# EAGLE board SparkFun Qwiic ToF Imager - VL53L5CX - Mini-Panel (EAGLE 9.6.2), part 1 of 7
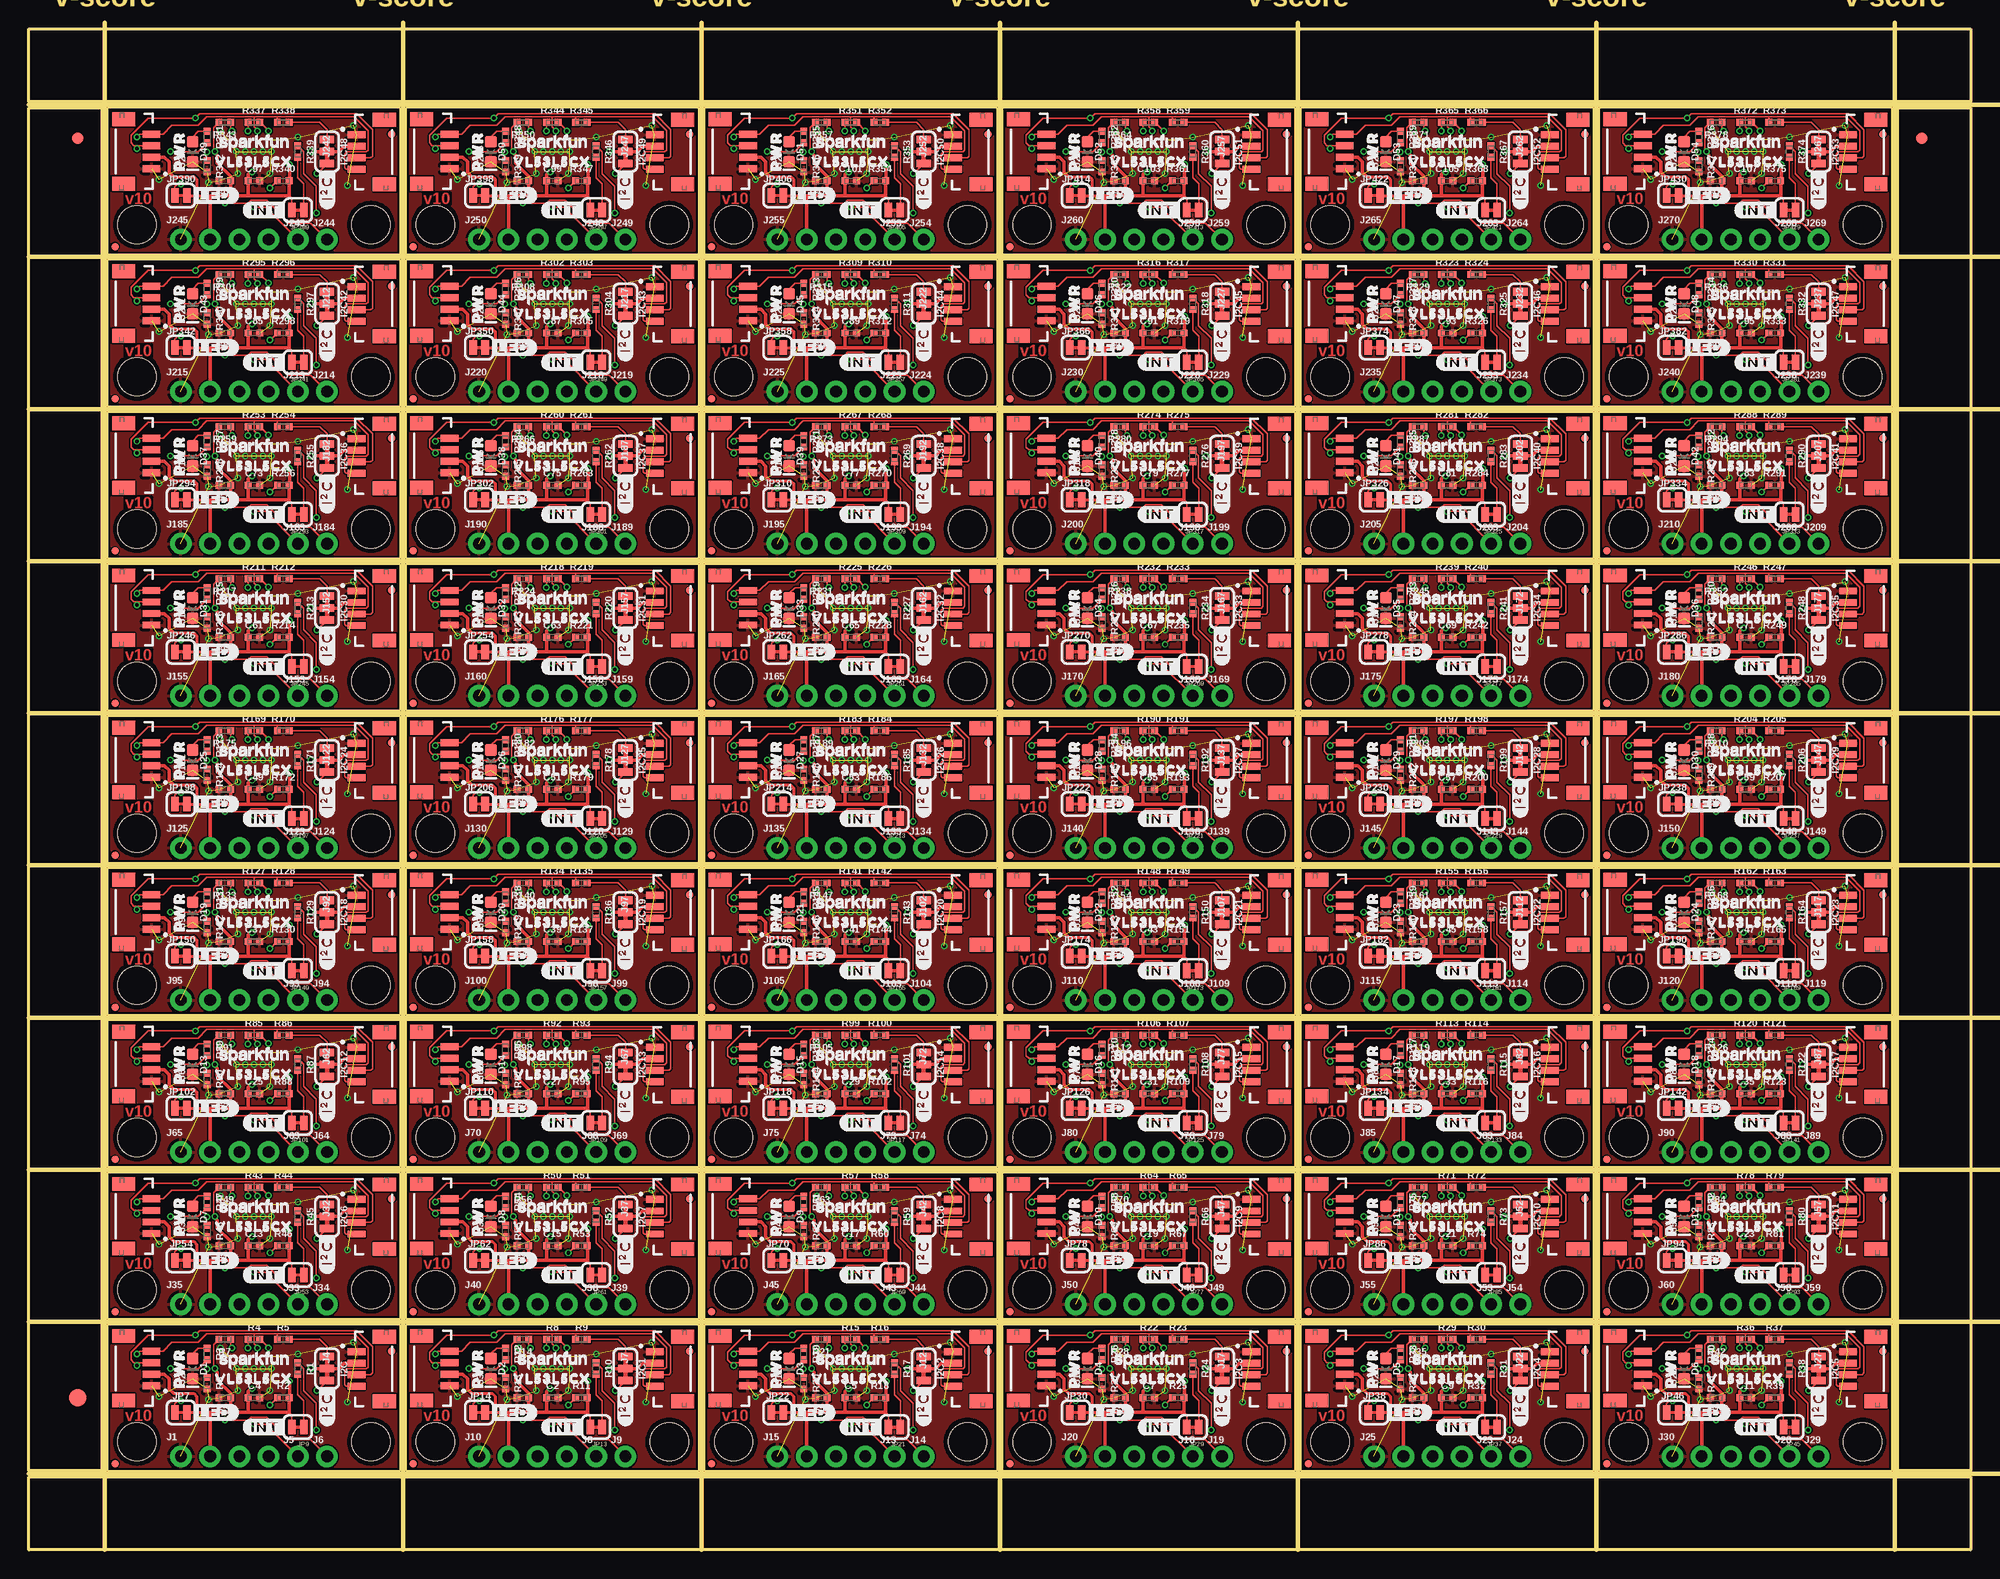
[diagram p0: board, top side]
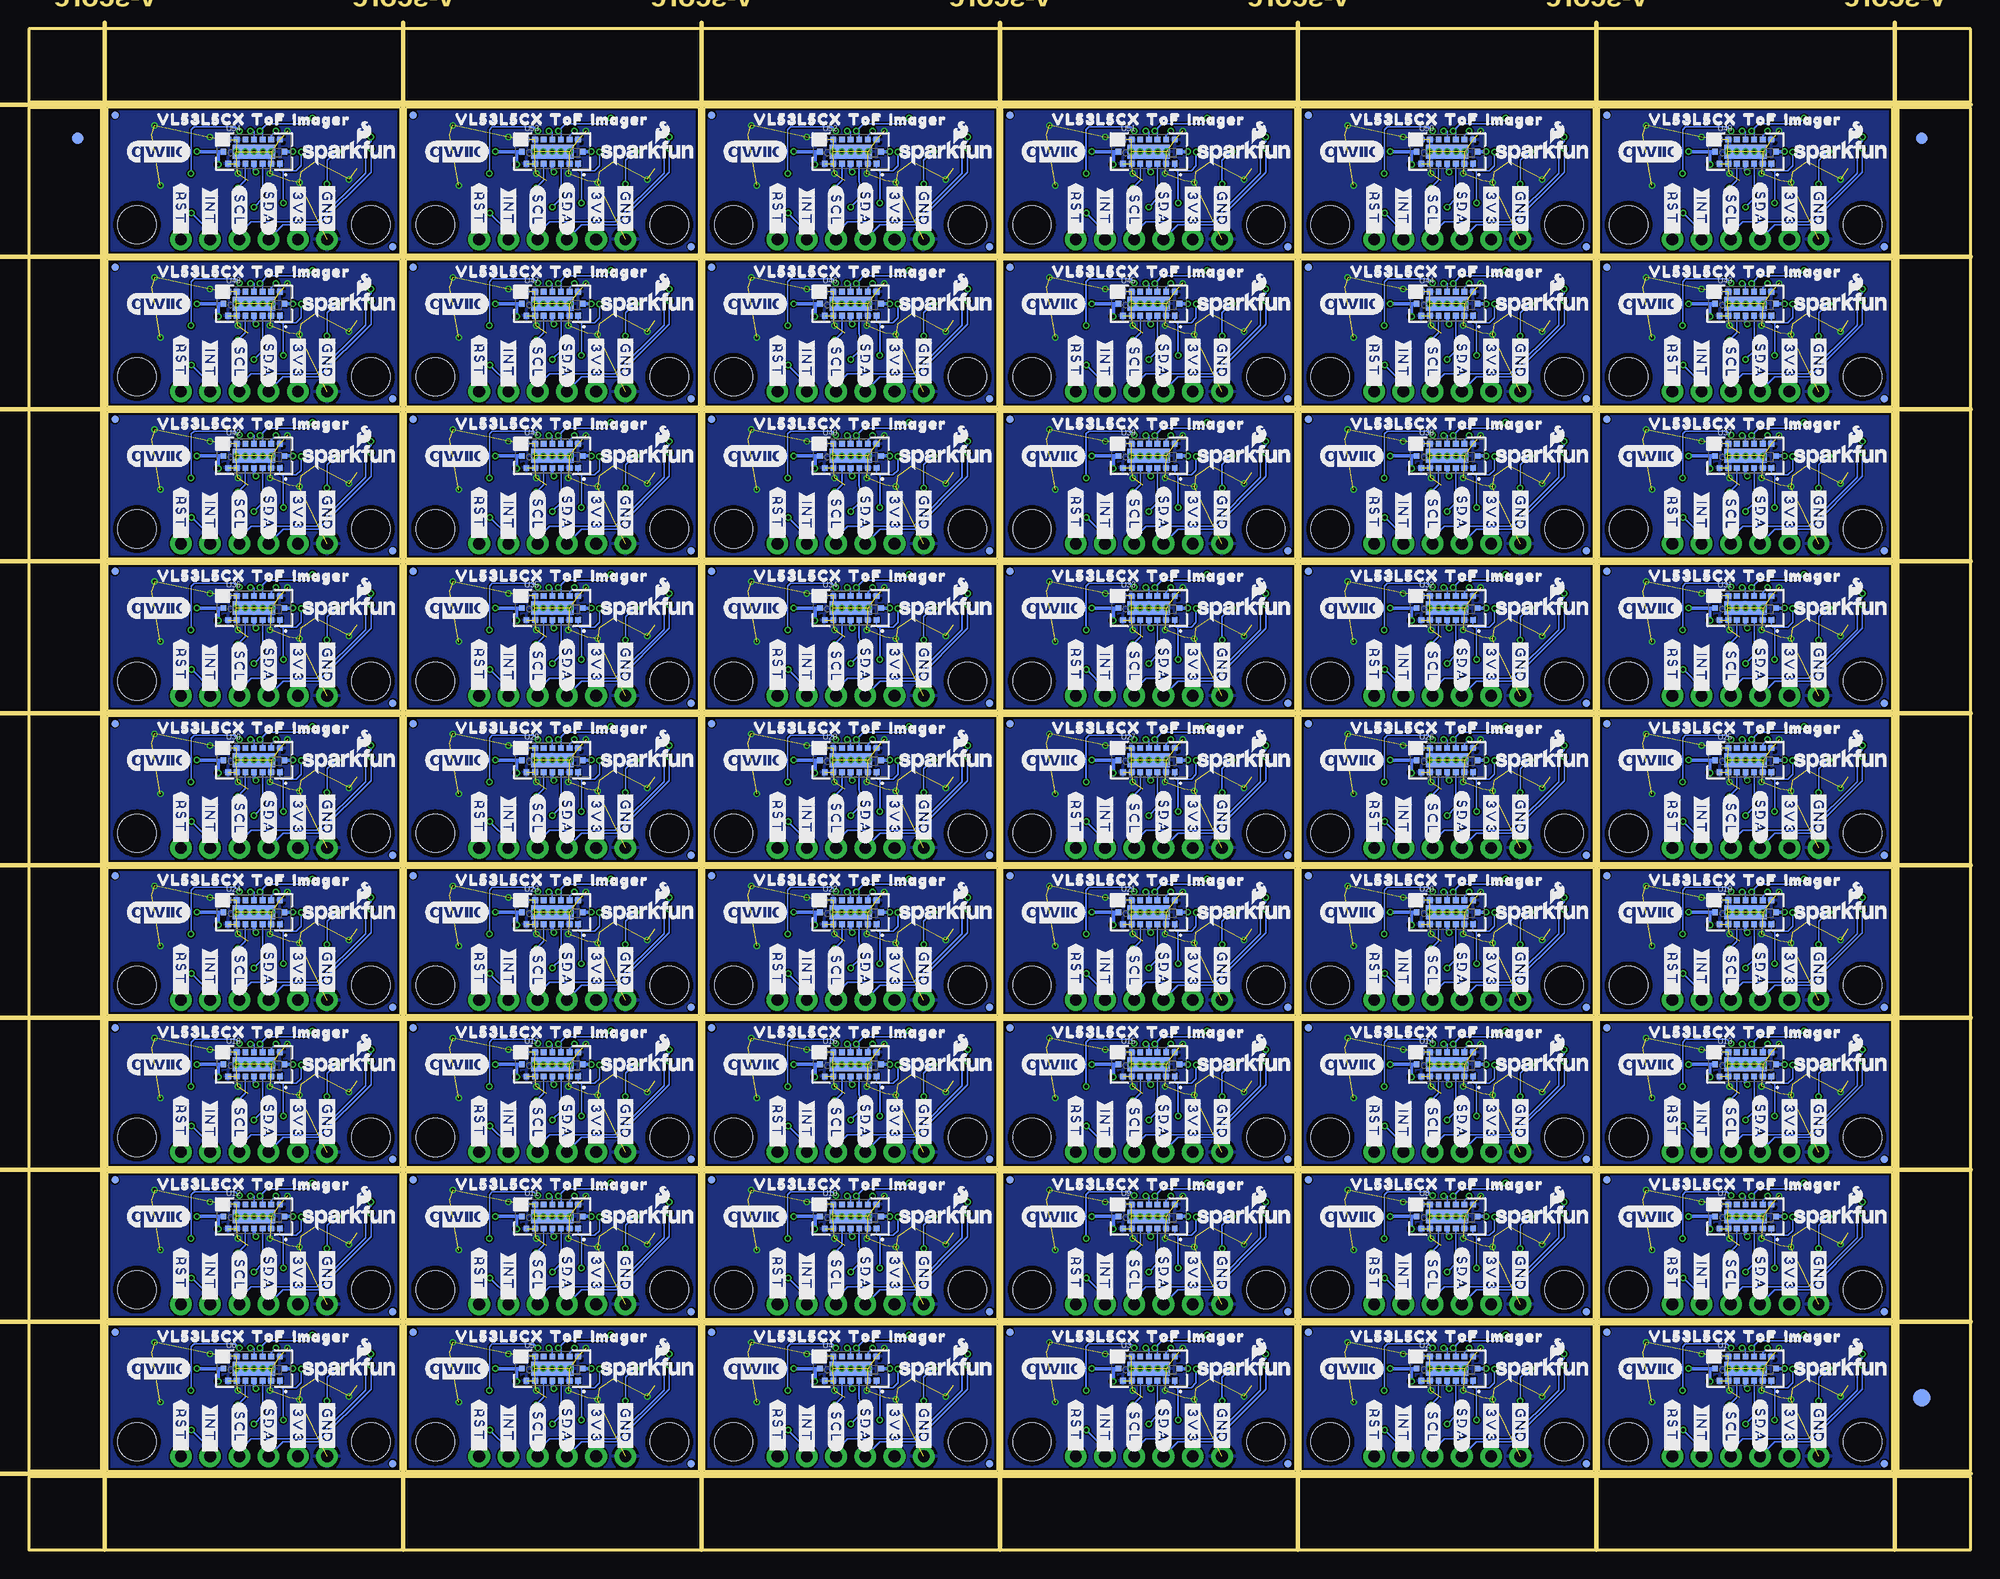
[diagram p1: board, bottom side, seen from below]

Size 168.66 x 132.08 mm. Coordinates in mm from the lower left corner, seen from the top.
Outline: 232 segments
Copper layers (1*16): Top 0.035mm / dielectric 1.5mm / Bottom 0.035mm
Design rules "SparkFun Qwiic ToF Imager - VL53L5CX - Mini": minimum track width 5mil, minimum drill 0.3mm, track to track 5mil, track to pad 5mil, pad to pad 5mil, via to via 5mil, smd to smd 5mil, copper to edge 7mil, drill to drill 7mil, minimum pad ring 5mil, minimum via ring 5mil, stop-mask expansion 2.5mil, vias tented up to drill 25mil, thermal gap 10mil
Milling: 17 lines

## Footprints (pad centres in the part's own frame; a part is rotated, then mirrored left to right if it is on the bottom)
0402-TIGHT = smd 0.6 x 0.6: 1 -0.5,0; 2 0.5,0
LED-0603 = smd 1 x 1: A -0.877,0; C 0.877,0
FIDUCIAL-1X2 = smd 1 x 1: 1 0,0
FIDUCIAL-1.5X3 = smd 1.5 x 1.5: 1 0,0
SMT-JUMPER_3_2-NC_TRACE_SILK = smd 0.66 x 1.27: 1 -1.041,0; 2 0,0; 3 1.041,0
1X04_NO_SILK = drill 1.016 pad 1.88: 1 0,0; 2 2.54,0; 3 5.08,0; 4 7.62,0
JST04_1MM_VERT = smd 0.6 x 1.55: 1 -1.478,0.775; 2 -0.478,0.775; 3 0.522,0.775; 4 1.522,0.775 | smd 1.2 x 2: NC1 -2.778,3.2; NC2 2.822,3.2
1X01_NO_SILK = drill 1.016 pad 1.88: 1 0,0
FIDUCIAL-MICRO = smd 0.635 x 0.635: 1 0,0
SMT-JUMPER_2_NC_TRACE_SILK = smd 0.66 x 1.27: 1 -0.521,0; 2 0.521,0
STAND-OFF = hole 3.302: 0,0
VL53L5CX = smd 0.5 x 0.5: A1 2.25,-1.05; A2 1.5,-1.05; A3 0.75,-1.05; A4 0,-1.05; A5 -0.75,-1.05; A6 -1.5,-1.05; A7 -2.25,-1.05; B1 2.65,0; B7 -2.65,0; C1 2.25,1.05; C2 1.5,1.05; C3 0.75,1.05; C4 0,1.05; C5 -0.75,1.05; C6 -1.5,1.05; C7 -2.25,1.05 | smd 3.7 x 1.2: B4 0,0

## Placement (x,y rotation side)
C1  4.7uF  [0402-TIGHT]  17.02,13.21 180 top
C2  0.1uF  [0402-TIGHT]  45.47,13.21 0 top
C3  4.7uF  [0402-TIGHT]  42.93,13.21 180 top
C4  0.1uF  [0402-TIGHT]  19.56,13.21 0 top
C5  0.1uF  [0402-TIGHT]  71.37,13.21 0 top
C6  4.7uF  [0402-TIGHT]  68.83,13.21 180 top
C7  0.1uF  [0402-TIGHT]  97.28,13.21 0 top
C8  4.7uF  [0402-TIGHT]  94.74,13.21 180 top
C9  0.1uF  [0402-TIGHT]  123.19,13.21 0 top
C10  4.7uF  [0402-TIGHT]  120.65,13.21 180 top
C11  0.1uF  [0402-TIGHT]  149.1,13.21 0 top
C12  4.7uF  [0402-TIGHT]  146.56,13.21 180 top
C13  0.1uF  [0402-TIGHT]  19.56,26.42 0 top
C14  4.7uF  [0402-TIGHT]  17.02,26.42 180 top
C15  0.1uF  [0402-TIGHT]  45.47,26.42 0 top
C16  4.7uF  [0402-TIGHT]  42.93,26.42 180 top
C17  0.1uF  [0402-TIGHT]  71.37,26.42 0 top
C18  4.7uF  [0402-TIGHT]  68.83,26.42 180 top
C19  0.1uF  [0402-TIGHT]  97.28,26.42 0 top
C20  4.7uF  [0402-TIGHT]  94.74,26.42 180 top
C21  0.1uF  [0402-TIGHT]  123.19,26.42 0 top
C22  4.7uF  [0402-TIGHT]  120.65,26.42 180 top
C23  0.1uF  [0402-TIGHT]  149.1,26.42 0 top
C24  4.7uF  [0402-TIGHT]  146.56,26.42 180 top
C25  0.1uF  [0402-TIGHT]  19.56,39.62 0 top
C26  4.7uF  [0402-TIGHT]  17.02,39.62 180 top
C27  0.1uF  [0402-TIGHT]  45.47,39.62 0 top
C28  4.7uF  [0402-TIGHT]  42.93,39.62 180 top
C29  0.1uF  [0402-TIGHT]  71.37,39.62 0 top
C30  4.7uF  [0402-TIGHT]  68.83,39.62 180 top
C31  0.1uF  [0402-TIGHT]  97.28,39.62 0 top
C32  4.7uF  [0402-TIGHT]  94.74,39.62 180 top
C33  0.1uF  [0402-TIGHT]  123.19,39.62 0 top
C34  4.7uF  [0402-TIGHT]  120.65,39.62 180 top
C35  0.1uF  [0402-TIGHT]  149.1,39.62 0 top
C36  4.7uF  [0402-TIGHT]  146.56,39.62 180 top
C37  0.1uF  [0402-TIGHT]  19.56,52.83 0 top
C38  4.7uF  [0402-TIGHT]  17.02,52.83 180 top
C39  0.1uF  [0402-TIGHT]  45.47,52.83 0 top
C40  4.7uF  [0402-TIGHT]  42.93,52.83 180 top
C41  0.1uF  [0402-TIGHT]  71.37,52.83 0 top
C42  4.7uF  [0402-TIGHT]  68.83,52.83 180 top
C43  0.1uF  [0402-TIGHT]  97.28,52.83 0 top
C44  4.7uF  [0402-TIGHT]  94.74,52.83 180 top
C45  0.1uF  [0402-TIGHT]  123.19,52.83 0 top
C46  4.7uF  [0402-TIGHT]  120.65,52.83 180 top
C47  0.1uF  [0402-TIGHT]  149.1,52.83 0 top
C48  4.7uF  [0402-TIGHT]  146.56,52.83 180 top
C49  0.1uF  [0402-TIGHT]  19.56,66.04 0 top
C50  4.7uF  [0402-TIGHT]  17.02,66.04 180 top
C51  0.1uF  [0402-TIGHT]  45.47,66.04 0 top
C52  4.7uF  [0402-TIGHT]  42.93,66.04 180 top
C53  0.1uF  [0402-TIGHT]  71.37,66.04 0 top
C54  4.7uF  [0402-TIGHT]  68.83,66.04 180 top
C55  0.1uF  [0402-TIGHT]  97.28,66.04 0 top
C56  4.7uF  [0402-TIGHT]  94.74,66.04 180 top
C57  0.1uF  [0402-TIGHT]  123.19,66.04 0 top
C58  4.7uF  [0402-TIGHT]  120.65,66.04 180 top
C59  0.1uF  [0402-TIGHT]  149.1,66.04 0 top
C60  4.7uF  [0402-TIGHT]  146.56,66.04 180 top
C61  0.1uF  [0402-TIGHT]  19.56,79.25 0 top
C62  4.7uF  [0402-TIGHT]  17.02,79.25 180 top
C63  0.1uF  [0402-TIGHT]  45.47,79.25 0 top
C64  4.7uF  [0402-TIGHT]  42.93,79.25 180 top
C65  0.1uF  [0402-TIGHT]  71.37,79.25 0 top
C66  4.7uF  [0402-TIGHT]  68.83,79.25 180 top
C67  0.1uF  [0402-TIGHT]  97.28,79.25 0 top
C68  4.7uF  [0402-TIGHT]  94.74,79.25 180 top
C69  0.1uF  [0402-TIGHT]  123.19,79.25 0 top
C70  4.7uF  [0402-TIGHT]  120.65,79.25 180 top
C71  0.1uF  [0402-TIGHT]  149.1,79.25 0 top
C72  4.7uF  [0402-TIGHT]  146.56,79.25 180 top
C73  0.1uF  [0402-TIGHT]  19.56,92.46 0 top
C74  4.7uF  [0402-TIGHT]  17.02,92.46 180 top
C75  0.1uF  [0402-TIGHT]  45.47,92.46 0 top
C76  4.7uF  [0402-TIGHT]  42.93,92.46 180 top
C77  0.1uF  [0402-TIGHT]  71.37,92.46 0 top
C78  4.7uF  [0402-TIGHT]  68.83,92.46 180 top
C79  0.1uF  [0402-TIGHT]  97.28,92.46 0 top
C80  4.7uF  [0402-TIGHT]  94.74,92.46 180 top
C81  0.1uF  [0402-TIGHT]  123.19,92.46 0 top
C82  4.7uF  [0402-TIGHT]  120.65,92.46 180 top
C83  0.1uF  [0402-TIGHT]  149.1,92.46 0 top
C84  4.7uF  [0402-TIGHT]  146.56,92.46 180 top
C85  0.1uF  [0402-TIGHT]  19.56,105.66 0 top
C86  4.7uF  [0402-TIGHT]  17.02,105.66 180 top
C87  0.1uF  [0402-TIGHT]  45.47,105.66 0 top
C88  4.7uF  [0402-TIGHT]  42.93,105.66 180 top
C89  0.1uF  [0402-TIGHT]  71.37,105.66 0 top
C90  4.7uF  [0402-TIGHT]  68.83,105.66 180 top
C91  0.1uF  [0402-TIGHT]  97.28,105.66 0 top
C92  4.7uF  [0402-TIGHT]  94.74,105.66 180 top
C93  0.1uF  [0402-TIGHT]  123.19,105.66 0 top
C94  4.7uF  [0402-TIGHT]  120.65,105.66 180 top
C95  0.1uF  [0402-TIGHT]  149.1,105.66 0 top
C96  4.7uF  [0402-TIGHT]  146.56,105.66 180 top
C97  0.1uF  [0402-TIGHT]  19.56,118.87 0 top
C98  4.7uF  [0402-TIGHT]  17.02,118.87 180 top
C99  0.1uF  [0402-TIGHT]  45.47,118.87 0 top
C100  4.7uF  [0402-TIGHT]  42.93,118.87 180 top
C101  0.1uF  [0402-TIGHT]  71.37,118.87 0 top
C102  4.7uF  [0402-TIGHT]  68.83,118.87 180 top
C103  0.1uF  [0402-TIGHT]  97.28,118.87 0 top
C104  4.7uF  [0402-TIGHT]  94.74,118.87 180 top
C105  0.1uF  [0402-TIGHT]  123.19,118.87 0 top
C106  4.7uF  [0402-TIGHT]  120.65,118.87 180 top
C107  0.1uF  [0402-TIGHT]  149.1,118.87 0 top
C108  4.7uF  [0402-TIGHT]  146.56,118.87 180 top
D1  RED  [LED-0603]  14.22,15.75 270 top
D2  RED  [LED-0603]  40.13,15.75 270 top
D3  RED  [LED-0603]  66.04,15.75 270 top
D4  RED  [LED-0603]  91.95,15.75 270 top
D5  RED  [LED-0603]  117.86,15.75 270 top
D6  RED  [LED-0603]  143.76,15.75 270 top
D7  RED  [LED-0603]  14.22,28.96 270 top
D8  RED  [LED-0603]  40.13,28.96 270 top
D9  RED  [LED-0603]  66.04,28.96 270 top
D10  RED  [LED-0603]  91.95,28.96 270 top
D11  RED  [LED-0603]  117.86,28.96 270 top
D12  RED  [LED-0603]  143.76,28.96 270 top
D13  RED  [LED-0603]  14.22,42.16 270 top
D14  RED  [LED-0603]  40.13,42.16 270 top
D15  RED  [LED-0603]  66.04,42.16 270 top
D16  RED  [LED-0603]  91.95,42.16 270 top
D17  RED  [LED-0603]  117.86,42.16 270 top
D18  RED  [LED-0603]  143.76,42.16 270 top
D19  RED  [LED-0603]  14.22,55.37 270 top
D20  RED  [LED-0603]  40.13,55.37 270 top
D21  RED  [LED-0603]  66.04,55.37 270 top
D22  RED  [LED-0603]  91.95,55.37 270 top
D23  RED  [LED-0603]  117.86,55.37 270 top
D24  RED  [LED-0603]  143.76,55.37 270 top
D25  RED  [LED-0603]  14.22,68.58 270 top
D26  RED  [LED-0603]  40.13,68.58 270 top
D27  RED  [LED-0603]  66.04,68.58 270 top
D28  RED  [LED-0603]  91.95,68.58 270 top
D29  RED  [LED-0603]  117.86,68.58 270 top
D30  RED  [LED-0603]  143.76,68.58 270 top
D31  RED  [LED-0603]  14.22,81.79 270 top
D32  RED  [LED-0603]  40.13,81.79 270 top
D33  RED  [LED-0603]  66.04,81.79 270 top
D34  RED  [LED-0603]  91.95,81.79 270 top
D35  RED  [LED-0603]  117.86,81.79 270 top
D36  RED  [LED-0603]  143.76,81.79 270 top
D37  RED  [LED-0603]  14.22,95 270 top
D38  RED  [LED-0603]  40.13,95 270 top
D39  RED  [LED-0603]  66.04,95 270 top
D40  RED  [LED-0603]  91.95,95 270 top
D41  RED  [LED-0603]  117.86,95 270 top
D42  RED  [LED-0603]  143.76,95 270 top
D43  RED  [LED-0603]  14.22,108.2 270 top
D44  RED  [LED-0603]  40.13,108.2 270 top
D45  RED  [LED-0603]  66.04,108.2 270 top
D46  RED  [LED-0603]  91.95,108.2 270 top
D47  RED  [LED-0603]  117.86,108.2 270 top
D48  RED  [LED-0603]  143.76,108.2 270 top
D49  RED  [LED-0603]  14.22,121.41 270 top
D50  RED  [LED-0603]  40.13,121.41 270 top
D51  RED  [LED-0603]  66.04,121.41 270 top
D52  RED  [LED-0603]  91.95,121.41 270 top
D53  RED  [LED-0603]  117.86,121.41 270 top
D54  RED  [LED-0603]  143.76,121.41 270 top
E$1  [FIDUCIAL-1X2]  4.23,122.56 0 top
E$2  [FIDUCIAL-1X2]  4.23,122.56 0 bottom
E$3  [FIDUCIAL-1X2]  164.42,122.56 0 top
E$4  [FIDUCIAL-1X2]  164.42,122.56 0 bottom
E$5  [FIDUCIAL-1.5X3]  4.23,13.21 0 top
E$6  [FIDUCIAL-1.5X3]  4.23,13.21 0 bottom
I2C  JUMPER-SMT_3_2-NC_TRACE_SILK  [SMT-JUMPER_3_2-NC_TRACE_SILK]  25.91,15.75 270 top
I2C1  JUMPER-SMT_3_2-NC_TRACE_SILK  [SMT-JUMPER_3_2-NC_TRACE_SILK]  51.82,15.75 270 top
I2C2  JUMPER-SMT_3_2-NC_TRACE_SILK  [SMT-JUMPER_3_2-NC_TRACE_SILK]  77.72,15.75 270 top
I2C3  JUMPER-SMT_3_2-NC_TRACE_SILK  [SMT-JUMPER_3_2-NC_TRACE_SILK]  103.63,15.75 270 top
I2C4  JUMPER-SMT_3_2-NC_TRACE_SILK  [SMT-JUMPER_3_2-NC_TRACE_SILK]  129.54,15.75 270 top
I2C5  JUMPER-SMT_3_2-NC_TRACE_SILK  [SMT-JUMPER_3_2-NC_TRACE_SILK]  155.45,15.75 270 top
I2C6  JUMPER-SMT_3_2-NC_TRACE_SILK  [SMT-JUMPER_3_2-NC_TRACE_SILK]  25.91,28.96 270 top
I2C7  JUMPER-SMT_3_2-NC_TRACE_SILK  [SMT-JUMPER_3_2-NC_TRACE_SILK]  51.82,28.96 270 top
I2C8  JUMPER-SMT_3_2-NC_TRACE_SILK  [SMT-JUMPER_3_2-NC_TRACE_SILK]  77.72,28.96 270 top
I2C9  JUMPER-SMT_3_2-NC_TRACE_SILK  [SMT-JUMPER_3_2-NC_TRACE_SILK]  103.63,28.96 270 top
I2C10  JUMPER-SMT_3_2-NC_TRACE_SILK  [SMT-JUMPER_3_2-NC_TRACE_SILK]  129.54,28.96 270 top
I2C11  JUMPER-SMT_3_2-NC_TRACE_SILK  [SMT-JUMPER_3_2-NC_TRACE_SILK]  155.45,28.96 270 top
I2C12  JUMPER-SMT_3_2-NC_TRACE_SILK  [SMT-JUMPER_3_2-NC_TRACE_SILK]  25.91,42.16 270 top
I2C13  JUMPER-SMT_3_2-NC_TRACE_SILK  [SMT-JUMPER_3_2-NC_TRACE_SILK]  51.82,42.16 270 top
I2C14  JUMPER-SMT_3_2-NC_TRACE_SILK  [SMT-JUMPER_3_2-NC_TRACE_SILK]  77.72,42.16 270 top
I2C15  JUMPER-SMT_3_2-NC_TRACE_SILK  [SMT-JUMPER_3_2-NC_TRACE_SILK]  103.63,42.16 270 top
I2C16  JUMPER-SMT_3_2-NC_TRACE_SILK  [SMT-JUMPER_3_2-NC_TRACE_SILK]  129.54,42.16 270 top
I2C17  JUMPER-SMT_3_2-NC_TRACE_SILK  [SMT-JUMPER_3_2-NC_TRACE_SILK]  155.45,42.16 270 top
I2C18  JUMPER-SMT_3_2-NC_TRACE_SILK  [SMT-JUMPER_3_2-NC_TRACE_SILK]  25.91,55.37 270 top
I2C19  JUMPER-SMT_3_2-NC_TRACE_SILK  [SMT-JUMPER_3_2-NC_TRACE_SILK]  51.82,55.37 270 top
I2C20  JUMPER-SMT_3_2-NC_TRACE_SILK  [SMT-JUMPER_3_2-NC_TRACE_SILK]  77.72,55.37 270 top
I2C21  JUMPER-SMT_3_2-NC_TRACE_SILK  [SMT-JUMPER_3_2-NC_TRACE_SILK]  103.63,55.37 270 top
I2C22  JUMPER-SMT_3_2-NC_TRACE_SILK  [SMT-JUMPER_3_2-NC_TRACE_SILK]  129.54,55.37 270 top
I2C23  JUMPER-SMT_3_2-NC_TRACE_SILK  [SMT-JUMPER_3_2-NC_TRACE_SILK]  155.45,55.37 270 top
I2C24  JUMPER-SMT_3_2-NC_TRACE_SILK  [SMT-JUMPER_3_2-NC_TRACE_SILK]  25.91,68.58 270 top
I2C25  JUMPER-SMT_3_2-NC_TRACE_SILK  [SMT-JUMPER_3_2-NC_TRACE_SILK]  51.82,68.58 270 top
I2C26  JUMPER-SMT_3_2-NC_TRACE_SILK  [SMT-JUMPER_3_2-NC_TRACE_SILK]  77.72,68.58 270 top
I2C27  JUMPER-SMT_3_2-NC_TRACE_SILK  [SMT-JUMPER_3_2-NC_TRACE_SILK]  103.63,68.58 270 top
I2C28  JUMPER-SMT_3_2-NC_TRACE_SILK  [SMT-JUMPER_3_2-NC_TRACE_SILK]  129.54,68.58 270 top
I2C29  JUMPER-SMT_3_2-NC_TRACE_SILK  [SMT-JUMPER_3_2-NC_TRACE_SILK]  155.45,68.58 270 top
I2C30  JUMPER-SMT_3_2-NC_TRACE_SILK  [SMT-JUMPER_3_2-NC_TRACE_SILK]  25.91,81.79 270 top
I2C31  JUMPER-SMT_3_2-NC_TRACE_SILK  [SMT-JUMPER_3_2-NC_TRACE_SILK]  51.82,81.79 270 top
I2C32  JUMPER-SMT_3_2-NC_TRACE_SILK  [SMT-JUMPER_3_2-NC_TRACE_SILK]  77.72,81.79 270 top
I2C33  JUMPER-SMT_3_2-NC_TRACE_SILK  [SMT-JUMPER_3_2-NC_TRACE_SILK]  103.63,81.79 270 top
I2C34  JUMPER-SMT_3_2-NC_TRACE_SILK  [SMT-JUMPER_3_2-NC_TRACE_SILK]  129.54,81.79 270 top
I2C35  JUMPER-SMT_3_2-NC_TRACE_SILK  [SMT-JUMPER_3_2-NC_TRACE_SILK]  155.45,81.79 270 top
I2C36  JUMPER-SMT_3_2-NC_TRACE_SILK  [SMT-JUMPER_3_2-NC_TRACE_SILK]  25.91,95 270 top
I2C37  JUMPER-SMT_3_2-NC_TRACE_SILK  [SMT-JUMPER_3_2-NC_TRACE_SILK]  51.82,95 270 top
I2C38  JUMPER-SMT_3_2-NC_TRACE_SILK  [SMT-JUMPER_3_2-NC_TRACE_SILK]  77.72,95 270 top
I2C39  JUMPER-SMT_3_2-NC_TRACE_SILK  [SMT-JUMPER_3_2-NC_TRACE_SILK]  103.63,95 270 top
I2C40  JUMPER-SMT_3_2-NC_TRACE_SILK  [SMT-JUMPER_3_2-NC_TRACE_SILK]  129.54,95 270 top
I2C41  JUMPER-SMT_3_2-NC_TRACE_SILK  [SMT-JUMPER_3_2-NC_TRACE_SILK]  155.45,95 270 top
I2C42  JUMPER-SMT_3_2-NC_TRACE_SILK  [SMT-JUMPER_3_2-NC_TRACE_SILK]  25.91,108.2 270 top
I2C43  JUMPER-SMT_3_2-NC_TRACE_SILK  [SMT-JUMPER_3_2-NC_TRACE_SILK]  51.82,108.2 270 top
I2C44  JUMPER-SMT_3_2-NC_TRACE_SILK  [SMT-JUMPER_3_2-NC_TRACE_SILK]  77.72,108.2 270 top
I2C45  JUMPER-SMT_3_2-NC_TRACE_SILK  [SMT-JUMPER_3_2-NC_TRACE_SILK]  103.63,108.2 270 top
I2C46  JUMPER-SMT_3_2-NC_TRACE_SILK  [SMT-JUMPER_3_2-NC_TRACE_SILK]  129.54,108.2 270 top
I2C47  JUMPER-SMT_3_2-NC_TRACE_SILK  [SMT-JUMPER_3_2-NC_TRACE_SILK]  155.45,108.2 270 top
I2C48  JUMPER-SMT_3_2-NC_TRACE_SILK  [SMT-JUMPER_3_2-NC_TRACE_SILK]  25.91,121.41 270 top
I2C49  JUMPER-SMT_3_2-NC_TRACE_SILK  [SMT-JUMPER_3_2-NC_TRACE_SILK]  51.82,121.41 270 top
I2C50  JUMPER-SMT_3_2-NC_TRACE_SILK  [SMT-JUMPER_3_2-NC_TRACE_SILK]  77.72,121.41 270 top
I2C51  JUMPER-SMT_3_2-NC_TRACE_SILK  [SMT-JUMPER_3_2-NC_TRACE_SILK]  103.63,121.41 270 top
I2C52  JUMPER-SMT_3_2-NC_TRACE_SILK  [SMT-JUMPER_3_2-NC_TRACE_SILK]  129.54,121.41 270 top
I2C53  JUMPER-SMT_3_2-NC_TRACE_SILK  [SMT-JUMPER_3_2-NC_TRACE_SILK]  155.45,121.41 270 top
J1  [1X04_NO_SILK]  13.21,8.13 0 top
J2  Vertical Qwiic Connector  [JST04_1MM_VERT]  11.43,15.75 90 top
J3  Vertical Qwiic Connector  [JST04_1MM_VERT]  37.34,15.75 90 top
J4  Vertical Qwiic Connector  [JST04_1MM_VERT]  27.69,15.75 270 top
J5  [1X01_NO_SILK]  23.37,8.13 0 top
J6  [1X01_NO_SILK]  25.91,8.13 0 top
J7  Vertical Qwiic Connector  [JST04_1MM_VERT]  53.59,15.75 270 top
J8  [1X01_NO_SILK]  49.28,8.13 0 top
J9  [1X01_NO_SILK]  51.82,8.13 0 top
J10  [1X04_NO_SILK]  39.12,8.13 0 top
J11  Vertical Qwiic Connector  [JST04_1MM_VERT]  63.25,15.75 90 top
J12  Vertical Qwiic Connector  [JST04_1MM_VERT]  79.5,15.75 270 top
J13  [1X01_NO_SILK]  75.18,8.13 0 top
J14  [1X01_NO_SILK]  77.72,8.13 0 top
J15  [1X04_NO_SILK]  65.02,8.13 0 top
J16  Vertical Qwiic Connector  [JST04_1MM_VERT]  89.15,15.75 90 top
J17  Vertical Qwiic Connector  [JST04_1MM_VERT]  105.41,15.75 270 top
J18  [1X01_NO_SILK]  101.09,8.13 0 top
J19  [1X01_NO_SILK]  103.63,8.13 0 top
J20  [1X04_NO_SILK]  90.93,8.13 0 top
J21  Vertical Qwiic Connector  [JST04_1MM_VERT]  115.06,15.75 90 top
J22  Vertical Qwiic Connector  [JST04_1MM_VERT]  131.32,15.75 270 top
J23  [1X01_NO_SILK]  127,8.13 0 top
J24  [1X01_NO_SILK]  129.54,8.13 0 top
J25  [1X04_NO_SILK]  116.84,8.13 0 top
J26  Vertical Qwiic Connector  [JST04_1MM_VERT]  140.97,15.75 90 top
J27  Vertical Qwiic Connector  [JST04_1MM_VERT]  157.23,15.75 270 top
J28  [1X01_NO_SILK]  152.91,8.13 0 top
J29  [1X01_NO_SILK]  155.45,8.13 0 top
J30  [1X04_NO_SILK]  142.75,8.13 0 top
J31  Vertical Qwiic Connector  [JST04_1MM_VERT]  11.43,28.96 90 top
J32  Vertical Qwiic Connector  [JST04_1MM_VERT]  27.69,28.96 270 top
J33  [1X01_NO_SILK]  23.37,21.34 0 top
J34  [1X01_NO_SILK]  25.91,21.34 0 top
J35  [1X04_NO_SILK]  13.21,21.34 0 top
J36  Vertical Qwiic Connector  [JST04_1MM_VERT]  37.34,28.96 90 top
J37  Vertical Qwiic Connector  [JST04_1MM_VERT]  53.59,28.96 270 top
J38  [1X01_NO_SILK]  49.28,21.34 0 top
J39  [1X01_NO_SILK]  51.82,21.34 0 top
J40  [1X04_NO_SILK]  39.12,21.34 0 top
J41  Vertical Qwiic Connector  [JST04_1MM_VERT]  63.25,28.96 90 top
J42  Vertical Qwiic Connector  [JST04_1MM_VERT]  79.5,28.96 270 top
J43  [1X01_NO_SILK]  75.18,21.34 0 top
J44  [1X01_NO_SILK]  77.72,21.34 0 top
J45  [1X04_NO_SILK]  65.02,21.34 0 top
J46  Vertical Qwiic Connector  [JST04_1MM_VERT]  89.15,28.96 90 top
J47  Vertical Qwiic Connector  [JST04_1MM_VERT]  105.41,28.96 270 top
J48  [1X01_NO_SILK]  101.09,21.34 0 top
J49  [1X01_NO_SILK]  103.63,21.34 0 top
J50  [1X04_NO_SILK]  90.93,21.34 0 top
J51  Vertical Qwiic Connector  [JST04_1MM_VERT]  115.06,28.96 90 top
J52  Vertical Qwiic Connector  [JST04_1MM_VERT]  131.32,28.96 270 top
J53  [1X01_NO_SILK]  127,21.34 0 top
J54  [1X01_NO_SILK]  129.54,21.34 0 top
J55  [1X04_NO_SILK]  116.84,21.34 0 top
J56  Vertical Qwiic Connector  [JST04_1MM_VERT]  140.97,28.96 90 top
J57  Vertical Qwiic Connector  [JST04_1MM_VERT]  157.23,28.96 270 top
J58  [1X01_NO_SILK]  152.91,21.34 0 top
J59  [1X01_NO_SILK]  155.45,21.34 0 top
J60  [1X04_NO_SILK]  142.75,21.34 0 top
J61  Vertical Qwiic Connector  [JST04_1MM_VERT]  11.43,42.16 90 top
J62  Vertical Qwiic Connector  [JST04_1MM_VERT]  27.69,42.16 270 top
J63  [1X01_NO_SILK]  23.37,34.54 0 top
J64  [1X01_NO_SILK]  25.91,34.54 0 top
J65  [1X04_NO_SILK]  13.21,34.54 0 top
J66  Vertical Qwiic Connector  [JST04_1MM_VERT]  37.34,42.16 90 top
J67  Vertical Qwiic Connector  [JST04_1MM_VERT]  53.59,42.16 270 top
J68  [1X01_NO_SILK]  49.28,34.54 0 top
J69  [1X01_NO_SILK]  51.82,34.54 0 top
J70  [1X04_NO_SILK]  39.12,34.54 0 top
J71  Vertical Qwiic Connector  [JST04_1MM_VERT]  63.25,42.16 90 top
J72  Vertical Qwiic Connector  [JST04_1MM_VERT]  79.5,42.16 270 top
J73  [1X01_NO_SILK]  75.18,34.54 0 top
J74  [1X01_NO_SILK]  77.72,34.54 0 top
J75  [1X04_NO_SILK]  65.02,34.54 0 top
J76  Vertical Qwiic Connector  [JST04_1MM_VERT]  89.15,42.16 90 top
J77  Vertical Qwiic Connector  [JST04_1MM_VERT]  105.41,42.16 270 top
J78  [1X01_NO_SILK]  101.09,34.54 0 top
J79  [1X01_NO_SILK]  103.63,34.54 0 top
J80  [1X04_NO_SILK]  90.93,34.54 0 top
J81  Vertical Qwiic Connector  [JST04_1MM_VERT]  115.06,42.16 90 top
J82  Vertical Qwiic Connector  [JST04_1MM_VERT]  131.32,42.16 270 top
J83  [1X01_NO_SILK]  127,34.54 0 top
J84  [1X01_NO_SILK]  129.54,34.54 0 top
J85  [1X04_NO_SILK]  116.84,34.54 0 top
J86  Vertical Qwiic Connector  [JST04_1MM_VERT]  140.97,42.16 90 top
J87  Vertical Qwiic Connector  [JST04_1MM_VERT]  157.23,42.16 270 top
J88  [1X01_NO_SILK]  152.91,34.54 0 top
J89  [1X01_NO_SILK]  155.45,34.54 0 top
J90  [1X04_NO_SILK]  142.75,34.54 0 top
J91  Vertical Qwiic Connector  [JST04_1MM_VERT]  11.43,55.37 90 top
J92  Vertical Qwiic Connector  [JST04_1MM_VERT]  27.69,55.37 270 top
J93  [1X01_NO_SILK]  23.37,47.75 0 top
J94  [1X01_NO_SILK]  25.91,47.75 0 top
J95  [1X04_NO_SILK]  13.21,47.75 0 top
J96  Vertical Qwiic Connector  [JST04_1MM_VERT]  37.34,55.37 90 top
J97  Vertical Qwiic Connector  [JST04_1MM_VERT]  53.59,55.37 270 top
J98  [1X01_NO_SILK]  49.28,47.75 0 top
J99  [1X01_NO_SILK]  51.82,47.75 0 top
J100  [1X04_NO_SILK]  39.12,47.75 0 top
J101  Vertical Qwiic Connector  [JST04_1MM_VERT]  63.25,55.37 90 top
J102  Vertical Qwiic Connector  [JST04_1MM_VERT]  79.5,55.37 270 top
J103  [1X01_NO_SILK]  75.18,47.75 0 top
J104  [1X01_NO_SILK]  77.72,47.75 0 top
J105  [1X04_NO_SILK]  65.02,47.75 0 top
J106  Vertical Qwiic Connector  [JST04_1MM_VERT]  89.15,55.37 90 top
J107  Vertical Qwiic Connector  [JST04_1MM_VERT]  105.41,55.37 270 top
J108  [1X01_NO_SILK]  101.09,47.75 0 top
J109  [1X01_NO_SILK]  103.63,47.75 0 top
J110  [1X04_NO_SILK]  90.93,47.75 0 top
J111  Vertical Qwiic Connector  [JST04_1MM_VERT]  115.06,55.37 90 top
J112  Vertical Qwiic Connector  [JST04_1MM_VERT]  131.32,55.37 270 top
J113  [1X01_NO_SILK]  127,47.75 0 top
J114  [1X01_NO_SILK]  129.54,47.75 0 top
J115  [1X04_NO_SILK]  116.84,47.75 0 top
J116  Vertical Qwiic Connector  [JST04_1MM_VERT]  140.97,55.37 90 top
J117  Vertical Qwiic Connector  [JST04_1MM_VERT]  157.23,55.37 270 top
J118  [1X01_NO_SILK]  152.91,47.75 0 top
J119  [1X01_NO_SILK]  155.45,47.75 0 top
J120  [1X04_NO_SILK]  142.75,47.75 0 top
J121  Vertical Qwiic Connector  [JST04_1MM_VERT]  11.43,68.58 90 top
J122  Vertical Qwiic Connector  [JST04_1MM_VERT]  27.69,68.58 270 top
J123  [1X01_NO_SILK]  23.37,60.96 0 top
J124  [1X01_NO_SILK]  25.91,60.96 0 top
J125  [1X04_NO_SILK]  13.21,60.96 0 top
J126  Vertical Qwiic Connector  [JST04_1MM_VERT]  37.34,68.58 90 top
J127  Vertical Qwiic Connector  [JST04_1MM_VERT]  53.59,68.58 270 top
J128  [1X01_NO_SILK]  49.28,60.96 0 top
J129  [1X01_NO_SILK]  51.82,60.96 0 top
J130  [1X04_NO_SILK]  39.12,60.96 0 top
J131  Vertical Qwiic Connector  [JST04_1MM_VERT]  63.25,68.58 90 top
J132  Vertical Qwiic Connector  [JST04_1MM_VERT]  79.5,68.58 270 top
J133  [1X01_NO_SILK]  75.18,60.96 0 top
J134  [1X01_NO_SILK]  77.72,60.96 0 top
J135  [1X04_NO_SILK]  65.02,60.96 0 top
J136  Vertical Qwiic Connector  [JST04_1MM_VERT]  89.15,68.58 90 top
J137  Vertical Qwiic Connector  [JST04_1MM_VERT]  105.41,68.58 270 top
J138  [1X01_NO_SILK]  101.09,60.96 0 top
J139  [1X01_NO_SILK]  103.63,60.96 0 top
J140  [1X04_NO_SILK]  90.93,60.96 0 top
J141  Vertical Qwiic Connector  [JST04_1MM_VERT]  115.06,68.58 90 top
J142  Vertical Qwiic Connector  [JST04_1MM_VERT]  131.32,68.58 270 top
J143  [1X01_NO_SILK]  127,60.96 0 top
J144  [1X01_NO_SILK]  129.54,60.96 0 top
J145  [1X04_NO_SILK]  116.84,60.96 0 top
J146  Vertical Qwiic Connector  [JST04_1MM_VERT]  140.97,68.58 90 top
J147  Vertical Qwiic Connector  [JST04_1MM_VERT]  157.23,68.58 270 top
J148  [1X01_NO_SILK]  152.91,60.96 0 top
J149  [1X01_NO_SILK]  155.45,60.96 0 top
J150  [1X04_NO_SILK]  142.75,60.96 0 top
J151  Vertical Qwiic Connector  [JST04_1MM_VERT]  11.43,81.79 90 top
J152  Vertical Qwiic Connector  [JST04_1MM_VERT]  27.69,81.79 270 top
J153  [1X01_NO_SILK]  23.37,74.17 0 top
J154  [1X01_NO_SILK]  25.91,74.17 0 top
J155  [1X04_NO_SILK]  13.21,74.17 0 top
J156  Vertical Qwiic Connector  [JST04_1MM_VERT]  37.34,81.79 90 top
J157  Vertical Qwiic Connector  [JST04_1MM_VERT]  53.59,81.79 270 top
J158  [1X01_NO_SILK]  49.28,74.17 0 top
J159  [1X01_NO_SILK]  51.82,74.17 0 top
J160  [1X04_NO_SILK]  39.12,74.17 0 top
J161  Vertical Qwiic Connector  [JST04_1MM_VERT]  63.25,81.79 90 top
J162  Vertical Qwiic Connector  [JST04_1MM_VERT]  79.5,81.79 270 top
J163  [1X01_NO_SILK]  75.18,74.17 0 top
J164  [1X01_NO_SILK]  77.72,74.17 0 top
J165  [1X04_NO_SILK]  65.02,74.17 0 top
J166  Vertical Qwiic Connector  [JST04_1MM_VERT]  89.15,81.79 90 top
J167  Vertical Qwiic Connector  [JST04_1MM_VERT]  105.41,81.79 270 top
J168  [1X01_NO_SILK]  101.09,74.17 0 top
J169  [1X01_NO_SILK]  103.63,74.17 0 top
J170  [1X04_NO_SILK]  90.93,74.17 0 top
J171  Vertical Qwiic Connector  [JST04_1MM_VERT]  115.06,81.79 90 top
J172  Vertical Qwiic Connector  [JST04_1MM_VERT]  131.32,81.79 270 top
J173  [1X01_NO_SILK]  127,74.17 0 top
J174  [1X01_NO_SILK]  129.54,74.17 0 top
J175  [1X04_NO_SILK]  116.84,74.17 0 top
J176  Vertical Qwiic Connector  [JST04_1MM_VERT]  140.97,81.79 90 top
J177  Vertical Qwiic Connector  [JST04_1MM_VERT]  157.23,81.79 270 top
J178  [1X01_NO_SILK]  152.91,74.17 0 top
J179  [1X01_NO_SILK]  155.45,74.17 0 top
J180  [1X04_NO_SILK]  142.75,74.17 0 top
J181  Vertical Qwiic Connector  [JST04_1MM_VERT]  11.43,95 90 top
J182  Vertical Qwiic Connector  [JST04_1MM_VERT]  27.69,95 270 top
J183  [1X01_NO_SILK]  23.37,87.38 0 top
J184  [1X01_NO_SILK]  25.91,87.38 0 top
J185  [1X04_NO_SILK]  13.21,87.38 0 top
J186  Vertical Qwiic Connector  [JST04_1MM_VERT]  37.34,95 90 top
J187  Vertical Qwiic Connector  [JST04_1MM_VERT]  53.59,95 270 top
J188  [1X01_NO_SILK]  49.28,87.38 0 top
J189  [1X01_NO_SILK]  51.82,87.38 0 top
J190  [1X04_NO_SILK]  39.12,87.38 0 top
J191  Vertical Qwiic Connector  [JST04_1MM_VERT]  63.25,95 90 top
J192  Vertical Qwiic Connector  [JST04_1MM_VERT]  79.5,95 270 top
J193  [1X01_NO_SILK]  75.18,87.38 0 top
J194  [1X01_NO_SILK]  77.72,87.38 0 top
J195  [1X04_NO_SILK]  65.02,87.38 0 top
J196  Vertical Qwiic Connector  [JST04_1MM_VERT]  89.15,95 90 top
J197  Vertical Qwiic Connector  [JST04_1MM_VERT]  105.41,95 270 top
J198  [1X01_NO_SILK]  101.09,87.38 0 top
J199  [1X01_NO_SILK]  103.63,87.38 0 top
J200  [1X04_NO_SILK]  90.93,87.38 0 top
J201  Vertical Qwiic Connector  [JST04_1MM_VERT]  115.06,95 90 top
J202  Vertical Qwiic Connector  [JST04_1MM_VERT]  131.32,95 270 top
J203  [1X01_NO_SILK]  127,87.38 0 top
J204  [1X01_NO_SILK]  129.54,87.38 0 top
J205  [1X04_NO_SILK]  116.84,87.38 0 top
J206  Vertical Qwiic Connector  [JST04_1MM_VERT]  140.97,95 90 top
J207  Vertical Qwiic Connector  [JST04_1MM_VERT]  157.23,95 270 top
J208  [1X01_NO_SILK]  152.91,87.38 0 top
J209  [1X01_NO_SILK]  155.45,87.38 0 top
J210  [1X04_NO_SILK]  142.75,87.38 0 top
J211  Vertical Qwiic Connector  [JST04_1MM_VERT]  11.43,108.2 90 top
J212  Vertical Qwiic Connector  [JST04_1MM_VERT]  27.69,108.2 270 top
J213  [1X01_NO_SILK]  23.37,100.58 0 top
J214  [1X01_NO_SILK]  25.91,100.58 0 top
J215  [1X04_NO_SILK]  13.21,100.58 0 top
J216  Vertical Qwiic Connector  [JST04_1MM_VERT]  37.34,108.2 90 top
J217  Vertical Qwiic Connector  [JST04_1MM_VERT]  53.59,108.2 270 top
J218  [1X01_NO_SILK]  49.28,100.58 0 top
J219  [1X01_NO_SILK]  51.82,100.58 0 top
J220  [1X04_NO_SILK]  39.12,100.58 0 top
J221  Vertical Qwiic Connector  [JST04_1MM_VERT]  63.25,108.2 90 top
J222  Vertical Qwiic Connector  [JST04_1MM_VERT]  79.5,108.2 270 top
J223  [1X01_NO_SILK]  75.18,100.58 0 top
J224  [1X01_NO_SILK]  77.72,100.58 0 top
J225  [1X04_NO_SILK]  65.02,100.58 0 top
J226  Vertical Qwiic Connector  [JST04_1MM_VERT]  89.15,108.2 90 top
J227  Vertical Qwiic Connector  [JST04_1MM_VERT]  105.41,108.2 270 top
J228  [1X01_NO_SILK]  101.09,100.58 0 top
J229  [1X01_NO_SILK]  103.63,100.58 0 top
J230  [1X04_NO_SILK]  90.93,100.58 0 top
J231  Vertical Qwiic Connector  [JST04_1MM_VERT]  115.06,108.2 90 top
J232  Vertical Qwiic Connector  [JST04_1MM_VERT]  131.32,108.2 270 top
J233  [1X01_NO_SILK]  127,100.58 0 top
J234  [1X01_NO_SILK]  129.54,100.58 0 top
J235  [1X04_NO_SILK]  116.84,100.58 0 top
J236  Vertical Qwiic Connector  [JST04_1MM_VERT]  140.97,108.2 90 top
J237  Vertical Qwiic Connector  [JST04_1MM_VERT]  157.23,108.2 270 top
J238  [1X01_NO_SILK]  152.91,100.58 0 top
J239  [1X01_NO_SILK]  155.45,100.58 0 top
J240  [1X04_NO_SILK]  142.75,100.58 0 top
J241  Vertical Qwiic Connector  [JST04_1MM_VERT]  11.43,121.41 90 top
J242  Vertical Qwiic Connector  [JST04_1MM_VERT]  27.69,121.41 270 top
J243  [1X01_NO_SILK]  23.37,113.79 0 top
J244  [1X01_NO_SILK]  25.91,113.79 0 top
J245  [1X04_NO_SILK]  13.21,113.79 0 top
J246  Vertical Qwiic Connector  [JST04_1MM_VERT]  37.34,121.41 90 top
J247  Vertical Qwiic Connector  [JST04_1MM_VERT]  53.59,121.41 270 top
J248  [1X01_NO_SILK]  49.28,113.79 0 top
J249  [1X01_NO_SILK]  51.82,113.79 0 top
J250  [1X04_NO_SILK]  39.12,113.79 0 top
J251  Vertical Qwiic Connector  [JST04_1MM_VERT]  63.25,121.41 90 top
J252  Vertical Qwiic Connector  [JST04_1MM_VERT]  79.5,121.41 270 top
J253  [1X01_NO_SILK]  75.18,113.79 0 top
J254  [1X01_NO_SILK]  77.72,113.79 0 top
J255  [1X04_NO_SILK]  65.02,113.79 0 top
J256  Vertical Qwiic Connector  [JST04_1MM_VERT]  89.15,121.41 90 top
J257  Vertical Qwiic Connector  [JST04_1MM_VERT]  105.41,121.41 270 top
J258  [1X01_NO_SILK]  101.09,113.79 0 top
J259  [1X01_NO_SILK]  103.63,113.79 0 top
J260  [1X04_NO_SILK]  90.93,113.79 0 top
J261  Vertical Qwiic Connector  [JST04_1MM_VERT]  115.06,121.41 90 top
J262  Vertical Qwiic Connector  [JST04_1MM_VERT]  131.32,121.41 270 top
J263  [1X01_NO_SILK]  127,113.79 0 top
J264  [1X01_NO_SILK]  129.54,113.79 0 top
J265  [1X04_NO_SILK]  116.84,113.79 0 top
J266  Vertical Qwiic Connector  [JST04_1MM_VERT]  140.97,121.41 90 top
J267  Vertical Qwiic Connector  [JST04_1MM_VERT]  157.23,121.41 270 top
J268  [1X01_NO_SILK]  152.91,113.79 0 top
J269  [1X01_NO_SILK]  155.45,113.79 0 top
J270  [1X04_NO_SILK]  142.75,113.79 0 top
JP1  FIDUCIALUFIDUCIAL  [FIDUCIAL-MICRO]  7.49,7.49 0 bottom
JP2  FIDUCIALUFIDUCIAL  [FIDUCIAL-MICRO]  31.5,17.27 0 top
JP3  FIDUCIALUFIDUCIAL  [FIDUCIAL-MICRO]  57.4,17.27 0 top
JP4  FIDUCIALUFIDUCIAL  [FIDUCIAL-MICRO]  33.4,7.49 0 top
JP5  FIDUCIALUFIDUCIAL  [FIDUCIAL-MICRO]  31.62,18.92 0 bottom
JP6  FIDUCIALUFIDUCIAL  [FIDUCIAL-MICRO]  7.49,7.49 0 top
JP7  PWR_LED  [SMT-JUMPER_2_NC_TRACE_SILK]  13.21,11.94 0 top
JP8  FIDUCIALUFIDUCIAL  [FIDUCIAL-MICRO]  33.4,7.49 0 bottom
JP9  INT  [SMT-JUMPER_2_NC_TRACE_SILK]  23.37,10.67 180 top
JP10  STAND-OFF  [STAND-OFF]  9.4,9.4 0 top
JP11  STAND-OFF  [STAND-OFF]  29.72,9.4 0 top
JP12  FIDUCIALUFIDUCIAL  [FIDUCIAL-MICRO]  57.53,18.92 0 bottom
JP13  INT  [SMT-JUMPER_2_NC_TRACE_SILK]  49.28,10.67 180 top
JP14  PWR_LED  [SMT-JUMPER_2_NC_TRACE_SILK]  39.12,11.94 0 top
JP15  STAND-OFF  [STAND-OFF]  35.31,9.4 0 top
JP16  STAND-OFF  [STAND-OFF]  55.63,9.4 0 top
JP17  FIDUCIALUFIDUCIAL  [FIDUCIAL-MICRO]  83.31,17.27 0 top
JP18  FIDUCIALUFIDUCIAL  [FIDUCIAL-MICRO]  59.31,7.49 0 top
JP19  FIDUCIALUFIDUCIAL  [FIDUCIAL-MICRO]  59.31,7.49 0 bottom
JP20  FIDUCIALUFIDUCIAL  [FIDUCIAL-MICRO]  83.44,18.92 0 bottom
JP21  INT  [SMT-JUMPER_2_NC_TRACE_SILK]  75.18,10.67 180 top
JP22  PWR_LED  [SMT-JUMPER_2_NC_TRACE_SILK]  65.02,11.94 0 top
JP23  STAND-OFF  [STAND-OFF]  61.21,9.4 0 top
JP24  STAND-OFF  [STAND-OFF]  81.53,9.4 0 top
JP25  FIDUCIALUFIDUCIAL  [FIDUCIAL-MICRO]  109.22,17.27 0 top
JP26  FIDUCIALUFIDUCIAL  [FIDUCIAL-MICRO]  85.22,7.49 0 top
JP27  FIDUCIALUFIDUCIAL  [FIDUCIAL-MICRO]  85.22,7.49 0 bottom
JP28  FIDUCIALUFIDUCIAL  [FIDUCIAL-MICRO]  109.35,18.92 0 bottom
JP29  INT  [SMT-JUMPER_2_NC_TRACE_SILK]  101.09,10.67 180 top
JP30  PWR_LED  [SMT-JUMPER_2_NC_TRACE_SILK]  90.93,11.94 0 top
JP31  STAND-OFF  [STAND-OFF]  87.12,9.4 0 top
JP32  STAND-OFF  [STAND-OFF]  107.44,9.4 0 top
JP33  FIDUCIALUFIDUCIAL  [FIDUCIAL-MICRO]  135.13,17.27 0 top
JP34  FIDUCIALUFIDUCIAL  [FIDUCIAL-MICRO]  111.12,7.49 0 top
JP35  FIDUCIALUFIDUCIAL  [FIDUCIAL-MICRO]  111.12,7.49 0 bottom
JP36  FIDUCIALUFIDUCIAL  [FIDUCIAL-MICRO]  135.25,18.92 0 bottom
JP37  INT  [SMT-JUMPER_2_NC_TRACE_SILK]  127,10.67 180 top
JP38  PWR_LED  [SMT-JUMPER_2_NC_TRACE_SILK]  116.84,11.94 0 top
JP39  STAND-OFF  [STAND-OFF]  113.03,9.4 0 top
JP40  STAND-OFF  [STAND-OFF]  133.35,9.4 0 top
JP41  FIDUCIALUFIDUCIAL  [FIDUCIAL-MICRO]  161.04,17.27 0 top
JP42  FIDUCIALUFIDUCIAL  [FIDUCIAL-MICRO]  137.03,7.49 0 top
JP43  FIDUCIALUFIDUCIAL  [FIDUCIAL-MICRO]  137.03,7.49 0 bottom
JP44  FIDUCIALUFIDUCIAL  [FIDUCIAL-MICRO]  161.16,18.92 0 bottom
JP45  INT  [SMT-JUMPER_2_NC_TRACE_SILK]  152.91,10.67 180 top
JP46  PWR_LED  [SMT-JUMPER_2_NC_TRACE_SILK]  142.75,11.94 0 top
JP47  STAND-OFF  [STAND-OFF]  138.94,9.4 0 top
JP48  STAND-OFF  [STAND-OFF]  159.26,9.4 0 top
JP49  FIDUCIALUFIDUCIAL  [FIDUCIAL-MICRO]  31.5,30.48 0 top
JP50  FIDUCIALUFIDUCIAL  [FIDUCIAL-MICRO]  7.49,20.7 0 top
JP51  FIDUCIALUFIDUCIAL  [FIDUCIAL-MICRO]  7.49,20.7 0 bottom
JP52  FIDUCIALUFIDUCIAL  [FIDUCIAL-MICRO]  31.62,32.13 0 bottom
JP53  INT  [SMT-JUMPER_2_NC_TRACE_SILK]  23.37,23.88 180 top
JP54  PWR_LED  [SMT-JUMPER_2_NC_TRACE_SILK]  13.21,25.15 0 top
JP55  STAND-OFF  [STAND-OFF]  9.4,22.61 0 top
JP56  STAND-OFF  [STAND-OFF]  29.72,22.61 0 top
JP57  FIDUCIALUFIDUCIAL  [FIDUCIAL-MICRO]  57.4,30.48 0 top
JP58  FIDUCIALUFIDUCIAL  [FIDUCIAL-MICRO]  33.4,20.7 0 top
JP59  FIDUCIALUFIDUCIAL  [FIDUCIAL-MICRO]  33.4,20.7 0 bottom
JP60  FIDUCIALUFIDUCIAL  [FIDUCIAL-MICRO]  57.53,32.13 0 bottom
JP61  INT  [SMT-JUMPER_2_NC_TRACE_SILK]  49.28,23.88 180 top
JP62  PWR_LED  [SMT-JUMPER_2_NC_TRACE_SILK]  39.12,25.15 0 top
JP63  STAND-OFF  [STAND-OFF]  35.31,22.61 0 top
JP64  STAND-OFF  [STAND-OFF]  55.63,22.61 0 top
JP65  FIDUCIALUFIDUCIAL  [FIDUCIAL-MICRO]  83.31,30.48 0 top
JP66  FIDUCIALUFIDUCIAL  [FIDUCIAL-MICRO]  59.31,20.7 0 top
JP67  FIDUCIALUFIDUCIAL  [FIDUCIAL-MICRO]  59.31,20.7 0 bottom
JP68  FIDUCIALUFIDUCIAL  [FIDUCIAL-MICRO]  83.44,32.13 0 bottom
JP69  INT  [SMT-JUMPER_2_NC_TRACE_SILK]  75.18,23.88 180 top
JP70  PWR_LED  [SMT-JUMPER_2_NC_TRACE_SILK]  65.02,25.15 0 top
JP71  STAND-OFF  [STAND-OFF]  61.21,22.61 0 top
JP72  STAND-OFF  [STAND-OFF]  81.53,22.61 0 top
JP73  FIDUCIALUFIDUCIAL  [FIDUCIAL-MICRO]  109.22,30.48 0 top
JP74  FIDUCIALUFIDUCIAL  [FIDUCIAL-MICRO]  85.22,20.7 0 top
JP75  FIDUCIALUFIDUCIAL  [FIDUCIAL-MICRO]  85.22,20.7 0 bottom
JP76  FIDUCIALUFIDUCIAL  [FIDUCIAL-MICRO]  109.35,32.13 0 bottom
JP77  INT  [SMT-JUMPER_2_NC_TRACE_SILK]  101.09,23.88 180 top
JP78  PWR_LED  [SMT-JUMPER_2_NC_TRACE_SILK]  90.93,25.15 0 top
JP79  STAND-OFF  [STAND-OFF]  87.12,22.61 0 top
JP80  STAND-OFF  [STAND-OFF]  107.44,22.61 0 top
JP81  FIDUCIALUFIDUCIAL  [FIDUCIAL-MICRO]  135.13,30.48 0 top
JP82  FIDUCIALUFIDUCIAL  [FIDUCIAL-MICRO]  111.12,20.7 0 top
JP83  FIDUCIALUFIDUCIAL  [FIDUCIAL-MICRO]  111.12,20.7 0 bottom
JP84  FIDUCIALUFIDUCIAL  [FIDUCIAL-MICRO]  135.25,32.13 0 bottom
JP85  INT  [SMT-JUMPER_2_NC_TRACE_SILK]  127,23.88 180 top
JP86  PWR_LED  [SMT-JUMPER_2_NC_TRACE_SILK]  116.84,25.15 0 top
JP87  STAND-OFF  [STAND-OFF]  113.03,22.61 0 top
JP88  STAND-OFF  [STAND-OFF]  133.35,22.61 0 top
JP89  FIDUCIALUFIDUCIAL  [FIDUCIAL-MICRO]  161.04,30.48 0 top
JP90  FIDUCIALUFIDUCIAL  [FIDUCIAL-MICRO]  137.03,20.7 0 top
JP91  FIDUCIALUFIDUCIAL  [FIDUCIAL-MICRO]  137.03,20.7 0 bottom
JP92  FIDUCIALUFIDUCIAL  [FIDUCIAL-MICRO]  161.16,32.13 0 bottom
JP93  INT  [SMT-JUMPER_2_NC_TRACE_SILK]  152.91,23.88 180 top
JP94  PWR_LED  [SMT-JUMPER_2_NC_TRACE_SILK]  142.75,25.15 0 top
JP95  STAND-OFF  [STAND-OFF]  138.94,22.61 0 top
JP96  STAND-OFF  [STAND-OFF]  159.26,22.61 0 top
JP97  FIDUCIALUFIDUCIAL  [FIDUCIAL-MICRO]  31.5,43.69 0 top
JP98  FIDUCIALUFIDUCIAL  [FIDUCIAL-MICRO]  7.49,33.91 0 top
JP99  FIDUCIALUFIDUCIAL  [FIDUCIAL-MICRO]  7.49,33.91 0 bottom
JP100  FIDUCIALUFIDUCIAL  [FIDUCIAL-MICRO]  31.62,45.34 0 bottom
JP101  INT  [SMT-JUMPER_2_NC_TRACE_SILK]  23.37,37.08 180 top
JP102  PWR_LED  [SMT-JUMPER_2_NC_TRACE_SILK]  13.21,38.35 0 top
JP103  STAND-OFF  [STAND-OFF]  9.4,35.81 0 top
JP104  STAND-OFF  [STAND-OFF]  29.72,35.81 0 top
JP105  FIDUCIALUFIDUCIAL  [FIDUCIAL-MICRO]  57.4,43.69 0 top
JP106  FIDUCIALUFIDUCIAL  [FIDUCIAL-MICRO]  33.4,33.91 0 top
JP107  FIDUCIALUFIDUCIAL  [FIDUCIAL-MICRO]  33.4,33.91 0 bottom
JP108  FIDUCIALUFIDUCIAL  [FIDUCIAL-MICRO]  57.53,45.34 0 bottom
JP109  INT  [SMT-JUMPER_2_NC_TRACE_SILK]  49.28,37.08 180 top
JP110  PWR_LED  [SMT-JUMPER_2_NC_TRACE_SILK]  39.12,38.35 0 top
JP111  STAND-OFF  [STAND-OFF]  35.31,35.81 0 top
JP112  STAND-OFF  [STAND-OFF]  55.63,35.81 0 top
JP113  FIDUCIALUFIDUCIAL  [FIDUCIAL-MICRO]  83.31,43.69 0 top
JP114  FIDUCIALUFIDUCIAL  [FIDUCIAL-MICRO]  59.31,33.91 0 top
JP115  FIDUCIALUFIDUCIAL  [FIDUCIAL-MICRO]  59.31,33.91 0 bottom
JP116  FIDUCIALUFIDUCIAL  [FIDUCIAL-MICRO]  83.44,45.34 0 bottom
JP117  INT  [SMT-JUMPER_2_NC_TRACE_SILK]  75.18,37.08 180 top
JP118  PWR_LED  [SMT-JUMPER_2_NC_TRACE_SILK]  65.02,38.35 0 top
JP119  STAND-OFF  [STAND-OFF]  61.21,35.81 0 top
JP120  STAND-OFF  [STAND-OFF]  81.53,35.81 0 top
JP121  FIDUCIALUFIDUCIAL  [FIDUCIAL-MICRO]  109.22,43.69 0 top
JP122  FIDUCIALUFIDUCIAL  [FIDUCIAL-MICRO]  85.22,33.91 0 top
JP123  FIDUCIALUFIDUCIAL  [FIDUCIAL-MICRO]  85.22,33.91 0 bottom
JP124  FIDUCIALUFIDUCIAL  [FIDUCIAL-MICRO]  109.35,45.34 0 bottom
JP125  INT  [SMT-JUMPER_2_NC_TRACE_SILK]  101.09,37.08 180 top
JP126  PWR_LED  [SMT-JUMPER_2_NC_TRACE_SILK]  90.93,38.35 0 top
JP127  STAND-OFF  [STAND-OFF]  87.12,35.81 0 top
JP128  STAND-OFF  [STAND-OFF]  107.44,35.81 0 top
JP129  FIDUCIALUFIDUCIAL  [FIDUCIAL-MICRO]  135.13,43.69 0 top
JP130  FIDUCIALUFIDUCIAL  [FIDUCIAL-MICRO]  111.12,33.91 0 top
JP131  FIDUCIALUFIDUCIAL  [FIDUCIAL-MICRO]  111.12,33.91 0 bottom
JP132  FIDUCIALUFIDUCIAL  [FIDUCIAL-MICRO]  135.25,45.34 0 bottom
JP133  INT  [SMT-JUMPER_2_NC_TRACE_SILK]  127,37.08 180 top
JP134  PWR_LED  [SMT-JUMPER_2_NC_TRACE_SILK]  116.84,38.35 0 top
JP135  STAND-OFF  [STAND-OFF]  113.03,35.81 0 top
JP136  STAND-OFF  [STAND-OFF]  133.35,35.81 0 top
JP137  FIDUCIALUFIDUCIAL  [FIDUCIAL-MICRO]  161.04,43.69 0 top
JP138  FIDUCIALUFIDUCIAL  [FIDUCIAL-MICRO]  137.03,33.91 0 top
JP139  FIDUCIALUFIDUCIAL  [FIDUCIAL-MICRO]  137.03,33.91 0 bottom
JP140  FIDUCIALUFIDUCIAL  [FIDUCIAL-MICRO]  161.16,45.34 0 bottom
JP141  INT  [SMT-JUMPER_2_NC_TRACE_SILK]  152.91,37.08 180 top
JP142  PWR_LED  [SMT-JUMPER_2_NC_TRACE_SILK]  142.75,38.35 0 top
JP143  STAND-OFF  [STAND-OFF]  138.94,35.81 0 top
JP144  STAND-OFF  [STAND-OFF]  159.26,35.81 0 top
JP145  FIDUCIALUFIDUCIAL  [FIDUCIAL-MICRO]  31.5,56.9 0 top
JP146  FIDUCIALUFIDUCIAL  [FIDUCIAL-MICRO]  7.49,47.12 0 top
JP147  FIDUCIALUFIDUCIAL  [FIDUCIAL-MICRO]  7.49,47.12 0 bottom
JP148  FIDUCIALUFIDUCIAL  [FIDUCIAL-MICRO]  31.62,58.55 0 bottom
JP149  INT  [SMT-JUMPER_2_NC_TRACE_SILK]  23.37,50.29 180 top
JP150  PWR_LED  [SMT-JUMPER_2_NC_TRACE_SILK]  13.21,51.56 0 top
JP151  STAND-OFF  [STAND-OFF]  9.4,49.02 0 top
JP152  STAND-OFF  [STAND-OFF]  29.72,49.02 0 top
JP153  FIDUCIALUFIDUCIAL  [FIDUCIAL-MICRO]  57.4,56.9 0 top
JP154  FIDUCIALUFIDUCIAL  [FIDUCIAL-MICRO]  33.4,47.12 0 top
JP155  FIDUCIALUFIDUCIAL  [FIDUCIAL-MICRO]  33.4,47.12 0 bottom
JP156  FIDUCIALUFIDUCIAL  [FIDUCIAL-MICRO]  57.53,58.55 0 bottom
JP157  INT  [SMT-JUMPER_2_NC_TRACE_SILK]  49.28,50.29 180 top
JP158  PWR_LED  [SMT-JUMPER_2_NC_TRACE_SILK]  39.12,51.56 0 top
JP159  STAND-OFF  [STAND-OFF]  35.31,49.02 0 top
JP160  STAND-OFF  [STAND-OFF]  55.63,49.02 0 top
JP161  FIDUCIALUFIDUCIAL  [FIDUCIAL-MICRO]  83.31,56.9 0 top
JP162  FIDUCIALUFIDUCIAL  [FIDUCIAL-MICRO]  59.31,47.12 0 top
JP163  FIDUCIALUFIDUCIAL  [FIDUCIAL-MICRO]  59.31,47.12 0 bottom
JP164  FIDUCIALUFIDUCIAL  [FIDUCIAL-MICRO]  83.44,58.55 0 bottom
JP165  INT  [SMT-JUMPER_2_NC_TRACE_SILK]  75.18,50.29 180 top
JP166  PWR_LED  [SMT-JUMPER_2_NC_TRACE_SILK]  65.02,51.56 0 top
JP167  STAND-OFF  [STAND-OFF]  61.21,49.02 0 top
JP168  STAND-OFF  [STAND-OFF]  81.53,49.02 0 top
JP169  FIDUCIALUFIDUCIAL  [FIDUCIAL-MICRO]  109.22,56.9 0 top
JP170  FIDUCIALUFIDUCIAL  [FIDUCIAL-MICRO]  85.22,47.12 0 top
JP171  FIDUCIALUFIDUCIAL  [FIDUCIAL-MICRO]  85.22,47.12 0 bottom
JP172  FIDUCIALUFIDUCIAL  [FIDUCIAL-MICRO]  109.35,58.55 0 bottom
JP173  INT  [SMT-JUMPER_2_NC_TRACE_SILK]  101.09,50.29 180 top
JP174  PWR_LED  [SMT-JUMPER_2_NC_TRACE_SILK]  90.93,51.56 0 top
JP175  STAND-OFF  [STAND-OFF]  87.12,49.02 0 top
JP176  STAND-OFF  [STAND-OFF]  107.44,49.02 0 top
JP177  FIDUCIALUFIDUCIAL  [FIDUCIAL-MICRO]  135.13,56.9 0 top
JP178  FIDUCIALUFIDUCIAL  [FIDUCIAL-MICRO]  111.12,47.12 0 top
JP179  FIDUCIALUFIDUCIAL  [FIDUCIAL-MICRO]  111.12,47.12 0 bottom
JP180  FIDUCIALUFIDUCIAL  [FIDUCIAL-MICRO]  135.25,58.55 0 bottom
JP181  INT  [SMT-JUMPER_2_NC_TRACE_SILK]  127,50.29 180 top
JP182  PWR_LED  [SMT-JUMPER_2_NC_TRACE_SILK]  116.84,51.56 0 top
JP183  STAND-OFF  [STAND-OFF]  113.03,49.02 0 top
JP184  STAND-OFF  [STAND-OFF]  133.35,49.02 0 top
JP185  FIDUCIALUFIDUCIAL  [FIDUCIAL-MICRO]  161.04,56.9 0 top
JP186  FIDUCIALUFIDUCIAL  [FIDUCIAL-MICRO]  137.03,47.12 0 top
JP187  FIDUCIALUFIDUCIAL  [FIDUCIAL-MICRO]  137.03,47.12 0 bottom
JP188  FIDUCIALUFIDUCIAL  [FIDUCIAL-MICRO]  161.16,58.55 0 bottom
JP189  INT  [SMT-JUMPER_2_NC_TRACE_SILK]  152.91,50.29 180 top
JP190  PWR_LED  [SMT-JUMPER_2_NC_TRACE_SILK]  142.75,51.56 0 top
JP191  STAND-OFF  [STAND-OFF]  138.94,49.02 0 top
JP192  STAND-OFF  [STAND-OFF]  159.26,49.02 0 top
JP193  FIDUCIALUFIDUCIAL  [FIDUCIAL-MICRO]  31.5,70.1 0 top
JP194  FIDUCIALUFIDUCIAL  [FIDUCIAL-MICRO]  7.49,60.32 0 top
JP195  FIDUCIALUFIDUCIAL  [FIDUCIAL-MICRO]  7.49,60.32 0 bottom
JP196  FIDUCIALUFIDUCIAL  [FIDUCIAL-MICRO]  31.62,71.76 0 bottom
JP197  INT  [SMT-JUMPER_2_NC_TRACE_SILK]  23.37,63.5 180 top
JP198  PWR_LED  [SMT-JUMPER_2_NC_TRACE_SILK]  13.21,64.77 0 top
JP199  STAND-OFF  [STAND-OFF]  9.4,62.23 0 top
JP200  STAND-OFF  [STAND-OFF]  29.72,62.23 0 top
JP201  FIDUCIALUFIDUCIAL  [FIDUCIAL-MICRO]  57.4,70.1 0 top
JP202  FIDUCIALUFIDUCIAL  [FIDUCIAL-MICRO]  33.4,60.32 0 top
JP203  FIDUCIALUFIDUCIAL  [FIDUCIAL-MICRO]  33.4,60.32 0 bottom
JP204  FIDUCIALUFIDUCIAL  [FIDUCIAL-MICRO]  57.53,71.76 0 bottom
JP205  INT  [SMT-JUMPER_2_NC_TRACE_SILK]  49.28,63.5 180 top
JP206  PWR_LED  [SMT-JUMPER_2_NC_TRACE_SILK]  39.12,64.77 0 top
JP207  STAND-OFF  [STAND-OFF]  35.31,62.23 0 top
JP208  STAND-OFF  [STAND-OFF]  55.63,62.23 0 top
JP209  FIDUCIALUFIDUCIAL  [FIDUCIAL-MICRO]  83.31,70.1 0 top
JP210  FIDUCIALUFIDUCIAL  [FIDUCIAL-MICRO]  59.31,60.32 0 top
JP211  FIDUCIALUFIDUCIAL  [FIDUCIAL-MICRO]  59.31,60.32 0 bottom
JP212  FIDUCIALUFIDUCIAL  [FIDUCIAL-MICRO]  83.44,71.76 0 bottom
JP213  INT  [SMT-JUMPER_2_NC_TRACE_SILK]  75.18,63.5 180 top
JP214  PWR_LED  [SMT-JUMPER_2_NC_TRACE_SILK]  65.02,64.77 0 top
JP215  STAND-OFF  [STAND-OFF]  61.21,62.23 0 top
JP216  STAND-OFF  [STAND-OFF]  81.53,62.23 0 top
JP217  FIDUCIALUFIDUCIAL  [FIDUCIAL-MICRO]  109.22,70.1 0 top
JP218  FIDUCIALUFIDUCIAL  [FIDUCIAL-MICRO]  85.22,60.32 0 top
JP219  FIDUCIALUFIDUCIAL  [FIDUCIAL-MICRO]  85.22,60.32 0 bottom
JP220  FIDUCIALUFIDUCIAL  [FIDUCIAL-MICRO]  109.35,71.76 0 bottom
JP221  INT  [SMT-JUMPER_2_NC_TRACE_SILK]  101.09,63.5 180 top
JP222  PWR_LED  [SMT-JUMPER_2_NC_TRACE_SILK]  90.93,64.77 0 top
JP223  STAND-OFF  [STAND-OFF]  87.12,62.23 0 top
JP224  STAND-OFF  [STAND-OFF]  107.44,62.23 0 top
JP225  FIDUCIALUFIDUCIAL  [FIDUCIAL-MICRO]  135.13,70.1 0 top
JP226  FIDUCIALUFIDUCIAL  [FIDUCIAL-MICRO]  111.12,60.32 0 top
JP227  FIDUCIALUFIDUCIAL  [FIDUCIAL-MICRO]  111.12,60.32 0 bottom
JP228  FIDUCIALUFIDUCIAL  [FIDUCIAL-MICRO]  135.25,71.76 0 bottom
JP229  INT  [SMT-JUMPER_2_NC_TRACE_SILK]  127,63.5 180 top
JP230  PWR_LED  [SMT-JUMPER_2_NC_TRACE_SILK]  116.84,64.77 0 top
JP231  STAND-OFF  [STAND-OFF]  113.03,62.23 0 top
JP232  STAND-OFF  [STAND-OFF]  133.35,62.23 0 top
JP233  FIDUCIALUFIDUCIAL  [FIDUCIAL-MICRO]  161.04,70.1 0 top
JP234  FIDUCIALUFIDUCIAL  [FIDUCIAL-MICRO]  137.03,60.32 0 top
JP235  FIDUCIALUFIDUCIAL  [FIDUCIAL-MICRO]  137.03,60.32 0 bottom
JP236  FIDUCIALUFIDUCIAL  [FIDUCIAL-MICRO]  161.16,71.76 0 bottom
JP237  INT  [SMT-JUMPER_2_NC_TRACE_SILK]  152.91,63.5 180 top
JP238  PWR_LED  [SMT-JUMPER_2_NC_TRACE_SILK]  142.75,64.77 0 top
JP239  STAND-OFF  [STAND-OFF]  138.94,62.23 0 top
JP240  STAND-OFF  [STAND-OFF]  159.26,62.23 0 top
JP241  FIDUCIALUFIDUCIAL  [FIDUCIAL-MICRO]  31.5,83.31 0 top
JP242  FIDUCIALUFIDUCIAL  [FIDUCIAL-MICRO]  7.49,73.53 0 top
JP243  FIDUCIALUFIDUCIAL  [FIDUCIAL-MICRO]  7.49,73.53 0 bottom
JP244  FIDUCIALUFIDUCIAL  [FIDUCIAL-MICRO]  31.62,84.96 0 bottom
JP245  INT  [SMT-JUMPER_2_NC_TRACE_SILK]  23.37,76.71 180 top
JP246  PWR_LED  [SMT-JUMPER_2_NC_TRACE_SILK]  13.21,77.98 0 top
JP247  STAND-OFF  [STAND-OFF]  9.4,75.44 0 top
JP248  STAND-OFF  [STAND-OFF]  29.72,75.44 0 top
JP249  FIDUCIALUFIDUCIAL  [FIDUCIAL-MICRO]  57.4,83.31 0 top
JP250  FIDUCIALUFIDUCIAL  [FIDUCIAL-MICRO]  33.4,73.53 0 top
JP251  FIDUCIALUFIDUCIAL  [FIDUCIAL-MICRO]  33.4,73.53 0 bottom
JP252  FIDUCIALUFIDUCIAL  [FIDUCIAL-MICRO]  57.53,84.96 0 bottom
JP253  INT  [SMT-JUMPER_2_NC_TRACE_SILK]  49.28,76.71 180 top
JP254  PWR_LED  [SMT-JUMPER_2_NC_TRACE_SILK]  39.12,77.98 0 top
JP255  STAND-OFF  [STAND-OFF]  35.31,75.44 0 top
JP256  STAND-OFF  [STAND-OFF]  55.63,75.44 0 top
JP257  FIDUCIALUFIDUCIAL  [FIDUCIAL-MICRO]  83.31,83.31 0 top
JP258  FIDUCIALUFIDUCIAL  [FIDUCIAL-MICRO]  59.31,73.53 0 top
JP259  FIDUCIALUFIDUCIAL  [FIDUCIAL-MICRO]  59.31,73.53 0 bottom
JP260  FIDUCIALUFIDUCIAL  [FIDUCIAL-MICRO]  83.44,84.96 0 bottom
JP261  INT  [SMT-JUMPER_2_NC_TRACE_SILK]  75.18,76.71 180 top
JP262  PWR_LED  [SMT-JUMPER_2_NC_TRACE_SILK]  65.02,77.98 0 top
JP263  STAND-OFF  [STAND-OFF]  61.21,75.44 0 top
JP264  STAND-OFF  [STAND-OFF]  81.53,75.44 0 top
JP265  FIDUCIALUFIDUCIAL  [FIDUCIAL-MICRO]  109.22,83.31 0 top
JP266  FIDUCIALUFIDUCIAL  [FIDUCIAL-MICRO]  85.22,73.53 0 top
JP267  FIDUCIALUFIDUCIAL  [FIDUCIAL-MICRO]  85.22,73.53 0 bottom
JP268  FIDUCIALUFIDUCIAL  [FIDUCIAL-MICRO]  109.35,84.96 0 bottom
JP269  INT  [SMT-JUMPER_2_NC_TRACE_SILK]  101.09,76.71 180 top
JP270  PWR_LED  [SMT-JUMPER_2_NC_TRACE_SILK]  90.93,77.98 0 top
JP271  STAND-OFF  [STAND-OFF]  87.12,75.44 0 top
JP272  STAND-OFF  [STAND-OFF]  107.44,75.44 0 top
JP273  FIDUCIALUFIDUCIAL  [FIDUCIAL-MICRO]  135.13,83.31 0 top
JP274  FIDUCIALUFIDUCIAL  [FIDUCIAL-MICRO]  111.12,73.53 0 top
JP275  FIDUCIALUFIDUCIAL  [FIDUCIAL-MICRO]  111.12,73.53 0 bottom
JP276  FIDUCIALUFIDUCIAL  [FIDUCIAL-MICRO]  135.25,84.96 0 bottom
JP277  INT  [SMT-JUMPER_2_NC_TRACE_SILK]  127,76.71 180 top
JP278  PWR_LED  [SMT-JUMPER_2_NC_TRACE_SILK]  116.84,77.98 0 top
JP279  STAND-OFF  [STAND-OFF]  113.03,75.44 0 top
JP280  STAND-OFF  [STAND-OFF]  133.35,75.44 0 top
JP281  FIDUCIALUFIDUCIAL  [FIDUCIAL-MICRO]  161.04,83.31 0 top
JP282  FIDUCIALUFIDUCIAL  [FIDUCIAL-MICRO]  137.03,73.53 0 top
JP283  FIDUCIALUFIDUCIAL  [FIDUCIAL-MICRO]  137.03,73.53 0 bottom
JP284  FIDUCIALUFIDUCIAL  [FIDUCIAL-MICRO]  161.16,84.96 0 bottom
JP285  INT  [SMT-JUMPER_2_NC_TRACE_SILK]  152.91,76.71 180 top
JP286  PWR_LED  [SMT-JUMPER_2_NC_TRACE_SILK]  142.75,77.98 0 top
JP287  STAND-OFF  [STAND-OFF]  138.94,75.44 0 top
JP288  STAND-OFF  [STAND-OFF]  159.26,75.44 0 top
JP289  FIDUCIALUFIDUCIAL  [FIDUCIAL-MICRO]  31.5,96.52 0 top
JP290  FIDUCIALUFIDUCIAL  [FIDUCIAL-MICRO]  7.49,86.74 0 top
JP291  FIDUCIALUFIDUCIAL  [FIDUCIAL-MICRO]  7.49,86.74 0 bottom
JP292  FIDUCIALUFIDUCIAL  [FIDUCIAL-MICRO]  31.62,98.17 0 bottom
JP293  INT  [SMT-JUMPER_2_NC_TRACE_SILK]  23.37,89.92 180 top
JP294  PWR_LED  [SMT-JUMPER_2_NC_TRACE_SILK]  13.21,91.19 0 top
JP295  STAND-OFF  [STAND-OFF]  9.4,88.65 0 top
JP296  STAND-OFF  [STAND-OFF]  29.72,88.65 0 top
JP297  FIDUCIALUFIDUCIAL  [FIDUCIAL-MICRO]  57.4,96.52 0 top
JP298  FIDUCIALUFIDUCIAL  [FIDUCIAL-MICRO]  33.4,86.74 0 top
JP299  FIDUCIALUFIDUCIAL  [FIDUCIAL-MICRO]  33.4,86.74 0 bottom
JP300  FIDUCIALUFIDUCIAL  [FIDUCIAL-MICRO]  57.53,98.17 0 bottom
JP301  INT  [SMT-JUMPER_2_NC_TRACE_SILK]  49.28,89.92 180 top
JP302  PWR_LED  [SMT-JUMPER_2_NC_TRACE_SILK]  39.12,91.19 0 top
JP303  STAND-OFF  [STAND-OFF]  35.31,88.65 0 top
JP304  STAND-OFF  [STAND-OFF]  55.63,88.65 0 top
JP305  FIDUCIALUFIDUCIAL  [FIDUCIAL-MICRO]  83.31,96.52 0 top
JP306  FIDUCIALUFIDUCIAL  [FIDUCIAL-MICRO]  59.31,86.74 0 top
JP307  FIDUCIALUFIDUCIAL  [FIDUCIAL-MICRO]  59.31,86.74 0 bottom
JP308  FIDUCIALUFIDUCIAL  [FIDUCIAL-MICRO]  83.44,98.17 0 bottom
JP309  INT  [SMT-JUMPER_2_NC_TRACE_SILK]  75.18,89.92 180 top
JP310  PWR_LED  [SMT-JUMPER_2_NC_TRACE_SILK]  65.02,91.19 0 top
JP311  STAND-OFF  [STAND-OFF]  61.21,88.65 0 top
JP312  STAND-OFF  [STAND-OFF]  81.53,88.65 0 top
JP313  FIDUCIALUFIDUCIAL  [FIDUCIAL-MICRO]  109.22,96.52 0 top
JP314  FIDUCIALUFIDUCIAL  [FIDUCIAL-MICRO]  85.22,86.74 0 top
JP315  FIDUCIALUFIDUCIAL  [FIDUCIAL-MICRO]  85.22,86.74 0 bottom
JP316  FIDUCIALUFIDUCIAL  [FIDUCIAL-MICRO]  109.35,98.17 0 bottom
JP317  INT  [SMT-JUMPER_2_NC_TRACE_SILK]  101.09,89.92 180 top
JP318  PWR_LED  [SMT-JUMPER_2_NC_TRACE_SILK]  90.93,91.19 0 top
JP319  STAND-OFF  [STAND-OFF]  87.12,88.65 0 top
JP320  STAND-OFF  [STAND-OFF]  107.44,88.65 0 top
JP321  FIDUCIALUFIDUCIAL  [FIDUCIAL-MICRO]  135.13,96.52 0 top
JP322  FIDUCIALUFIDUCIAL  [FIDUCIAL-MICRO]  111.12,86.74 0 top
JP323  FIDUCIALUFIDUCIAL  [FIDUCIAL-MICRO]  111.12,86.74 0 bottom
JP324  FIDUCIALUFIDUCIAL  [FIDUCIAL-MICRO]  135.25,98.17 0 bottom
JP325  INT  [SMT-JUMPER_2_NC_TRACE_SILK]  127,89.92 180 top
JP326  PWR_LED  [SMT-JUMPER_2_NC_TRACE_SILK]  116.84,91.19 0 top
JP327  STAND-OFF  [STAND-OFF]  113.03,88.65 0 top
JP328  STAND-OFF  [STAND-OFF]  133.35,88.65 0 top
JP329  FIDUCIALUFIDUCIAL  [FIDUCIAL-MICRO]  161.04,96.52 0 top
JP330  FIDUCIALUFIDUCIAL  [FIDUCIAL-MICRO]  137.03,86.74 0 top
JP331  FIDUCIALUFIDUCIAL  [FIDUCIAL-MICRO]  137.03,86.74 0 bottom
JP332  FIDUCIALUFIDUCIAL  [FIDUCIAL-MICRO]  161.16,98.17 0 bottom
JP333  INT  [SMT-JUMPER_2_NC_TRACE_SILK]  152.91,89.92 180 top
JP334  PWR_LED  [SMT-JUMPER_2_NC_TRACE_SILK]  142.75,91.19 0 top
JP335  STAND-OFF  [STAND-OFF]  138.94,88.65 0 top
JP336  STAND-OFF  [STAND-OFF]  159.26,88.65 0 top
JP337  FIDUCIALUFIDUCIAL  [FIDUCIAL-MICRO]  31.5,109.73 0 top
JP338  FIDUCIALUFIDUCIAL  [FIDUCIAL-MICRO]  7.49,99.95 0 top
JP339  FIDUCIALUFIDUCIAL  [FIDUCIAL-MICRO]  7.49,99.95 0 bottom
JP340  FIDUCIALUFIDUCIAL  [FIDUCIAL-MICRO]  31.62,111.38 0 bottom
JP341  INT  [SMT-JUMPER_2_NC_TRACE_SILK]  23.37,103.12 180 top
JP342  PWR_LED  [SMT-JUMPER_2_NC_TRACE_SILK]  13.21,104.39 0 top
JP343  STAND-OFF  [STAND-OFF]  9.4,101.85 0 top
JP344  STAND-OFF  [STAND-OFF]  29.72,101.85 0 top
JP345  FIDUCIALUFIDUCIAL  [FIDUCIAL-MICRO]  57.4,109.73 0 top
JP346  FIDUCIALUFIDUCIAL  [FIDUCIAL-MICRO]  33.4,99.95 0 top
JP347  FIDUCIALUFIDUCIAL  [FIDUCIAL-MICRO]  33.4,99.95 0 bottom
JP348  FIDUCIALUFIDUCIAL  [FIDUCIAL-MICRO]  57.53,111.38 0 bottom
JP349  INT  [SMT-JUMPER_2_NC_TRACE_SILK]  49.28,103.12 180 top
JP350  PWR_LED  [SMT-JUMPER_2_NC_TRACE_SILK]  39.12,104.39 0 top
JP351  STAND-OFF  [STAND-OFF]  35.31,101.85 0 top
JP352  STAND-OFF  [STAND-OFF]  55.63,101.85 0 top
JP353  FIDUCIALUFIDUCIAL  [FIDUCIAL-MICRO]  83.31,109.73 0 top
JP354  FIDUCIALUFIDUCIAL  [FIDUCIAL-MICRO]  59.31,99.95 0 top
JP355  FIDUCIALUFIDUCIAL  [FIDUCIAL-MICRO]  59.31,99.95 0 bottom
JP356  FIDUCIALUFIDUCIAL  [FIDUCIAL-MICRO]  83.44,111.38 0 bottom
JP357  INT  [SMT-JUMPER_2_NC_TRACE_SILK]  75.18,103.12 180 top
JP358  PWR_LED  [SMT-JUMPER_2_NC_TRACE_SILK]  65.02,104.39 0 top
JP359  STAND-OFF  [STAND-OFF]  61.21,101.85 0 top
JP360  STAND-OFF  [STAND-OFF]  81.53,101.85 0 top
JP361  FIDUCIALUFIDUCIAL  [FIDUCIAL-MICRO]  109.22,109.73 0 top
JP362  FIDUCIALUFIDUCIAL  [FIDUCIAL-MICRO]  85.22,99.95 0 top
JP363  FIDUCIALUFIDUCIAL  [FIDUCIAL-MICRO]  85.22,99.95 0 bottom
JP364  FIDUCIALUFIDUCIAL  [FIDUCIAL-MICRO]  109.35,111.38 0 bottom
JP365  INT  [SMT-JUMPER_2_NC_TRACE_SILK]  101.09,103.12 180 top
JP366  PWR_LED  [SMT-JUMPER_2_NC_TRACE_SILK]  90.93,104.39 0 top